# EAGLE board SparkFun_TMC6300_Breakout-Panel (EAGLE 9.6.2), part 1 of 5
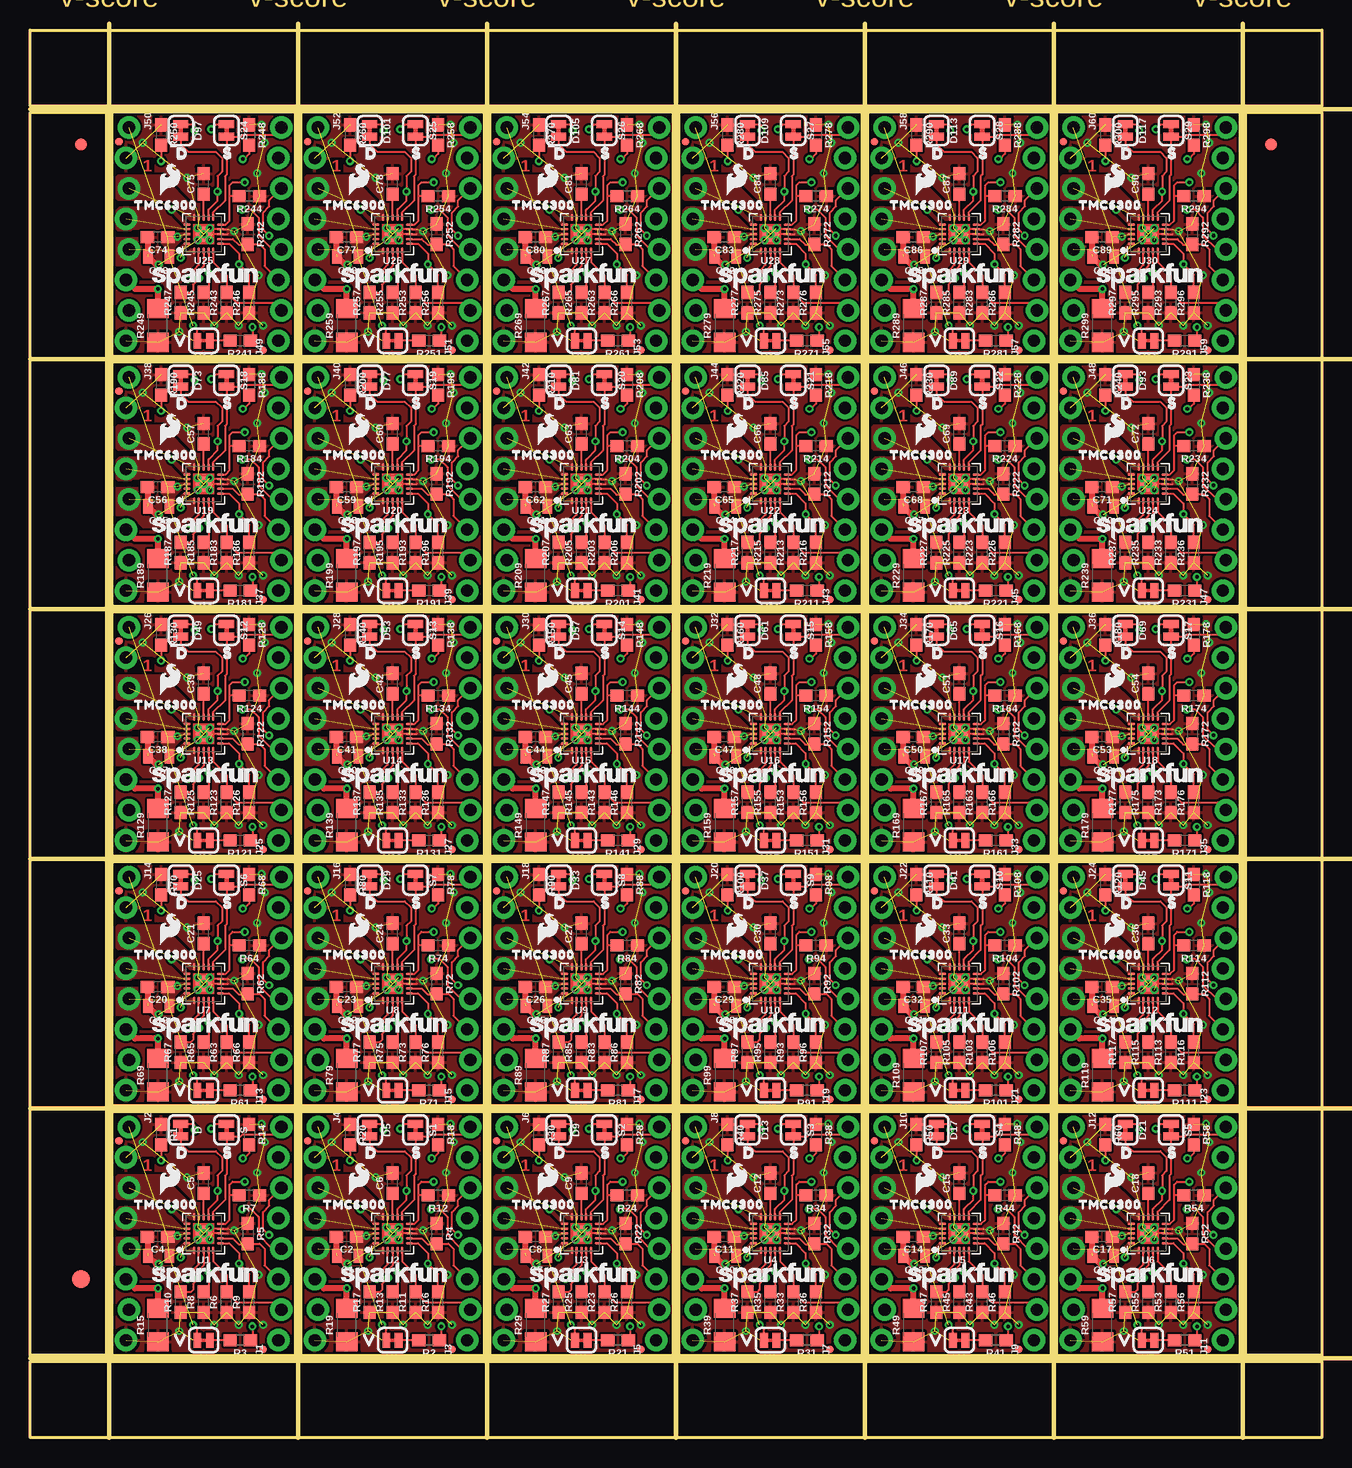
[diagram p0: board, top side]
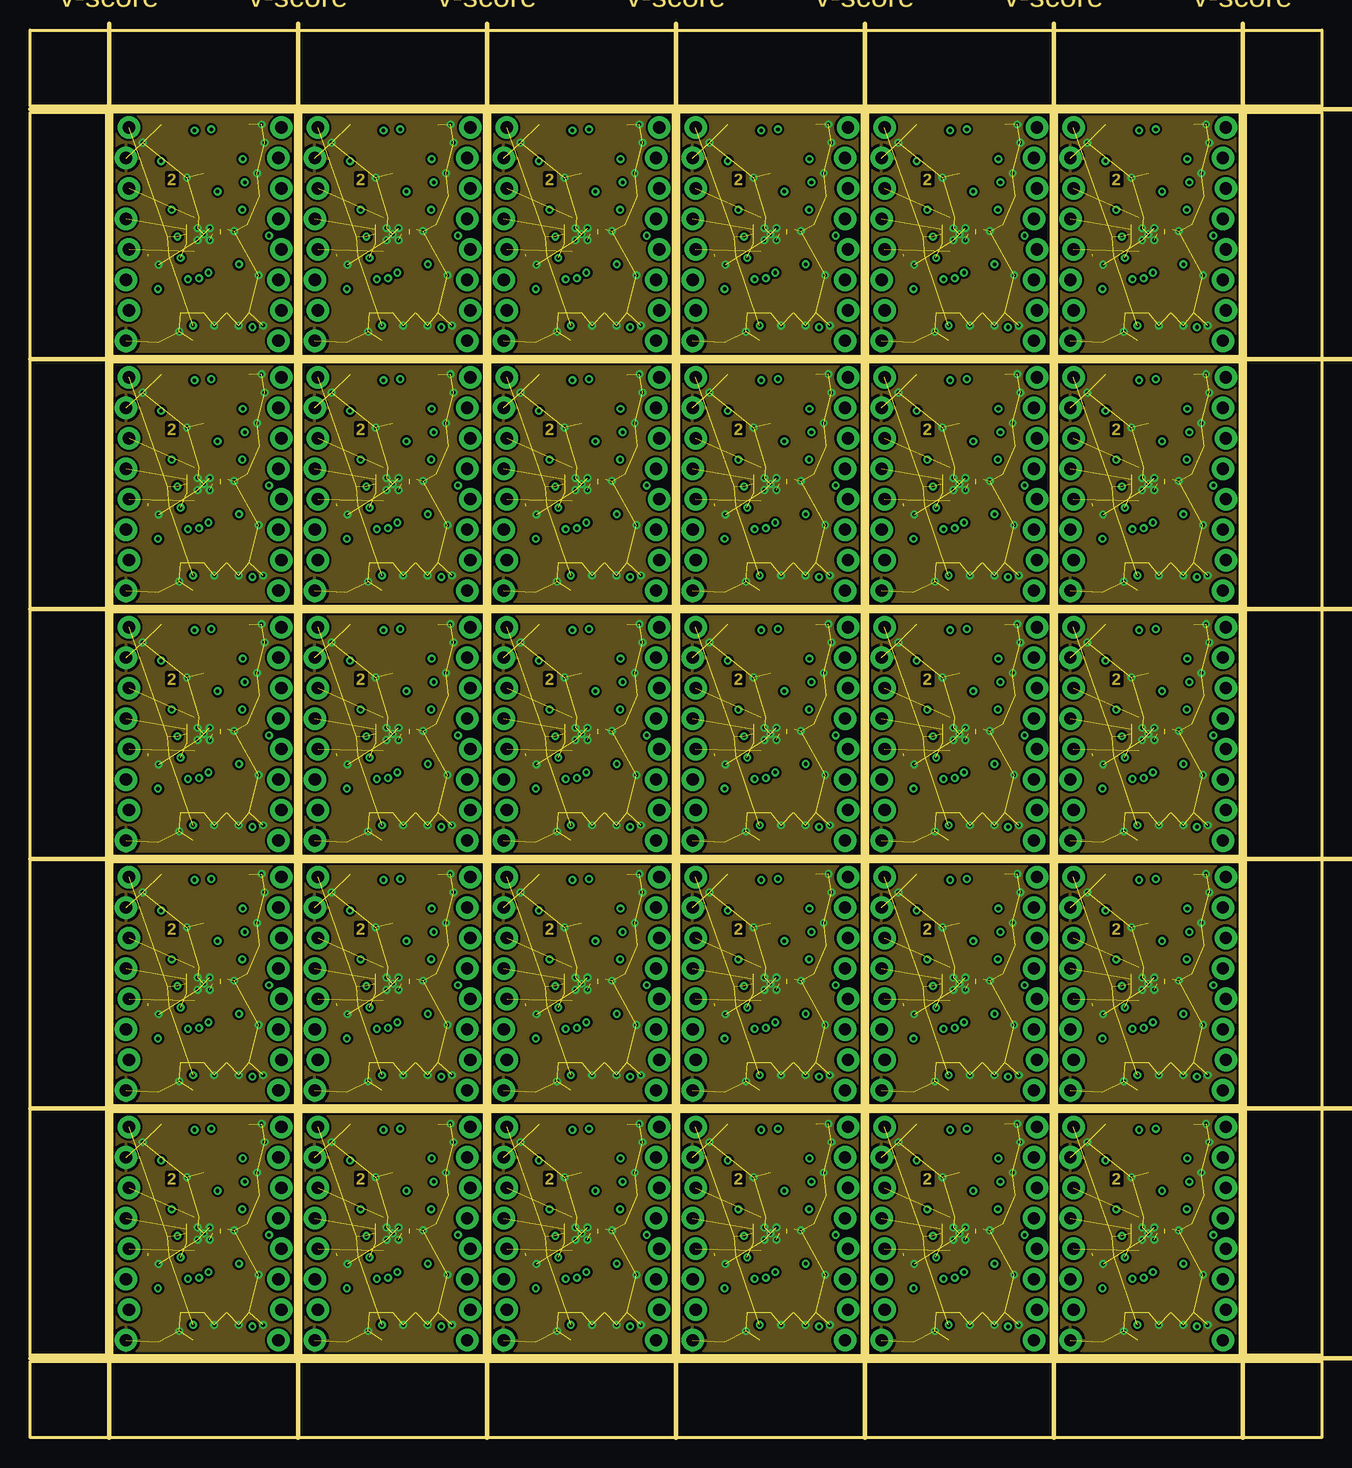
[diagram p1: board, inner layer 2]
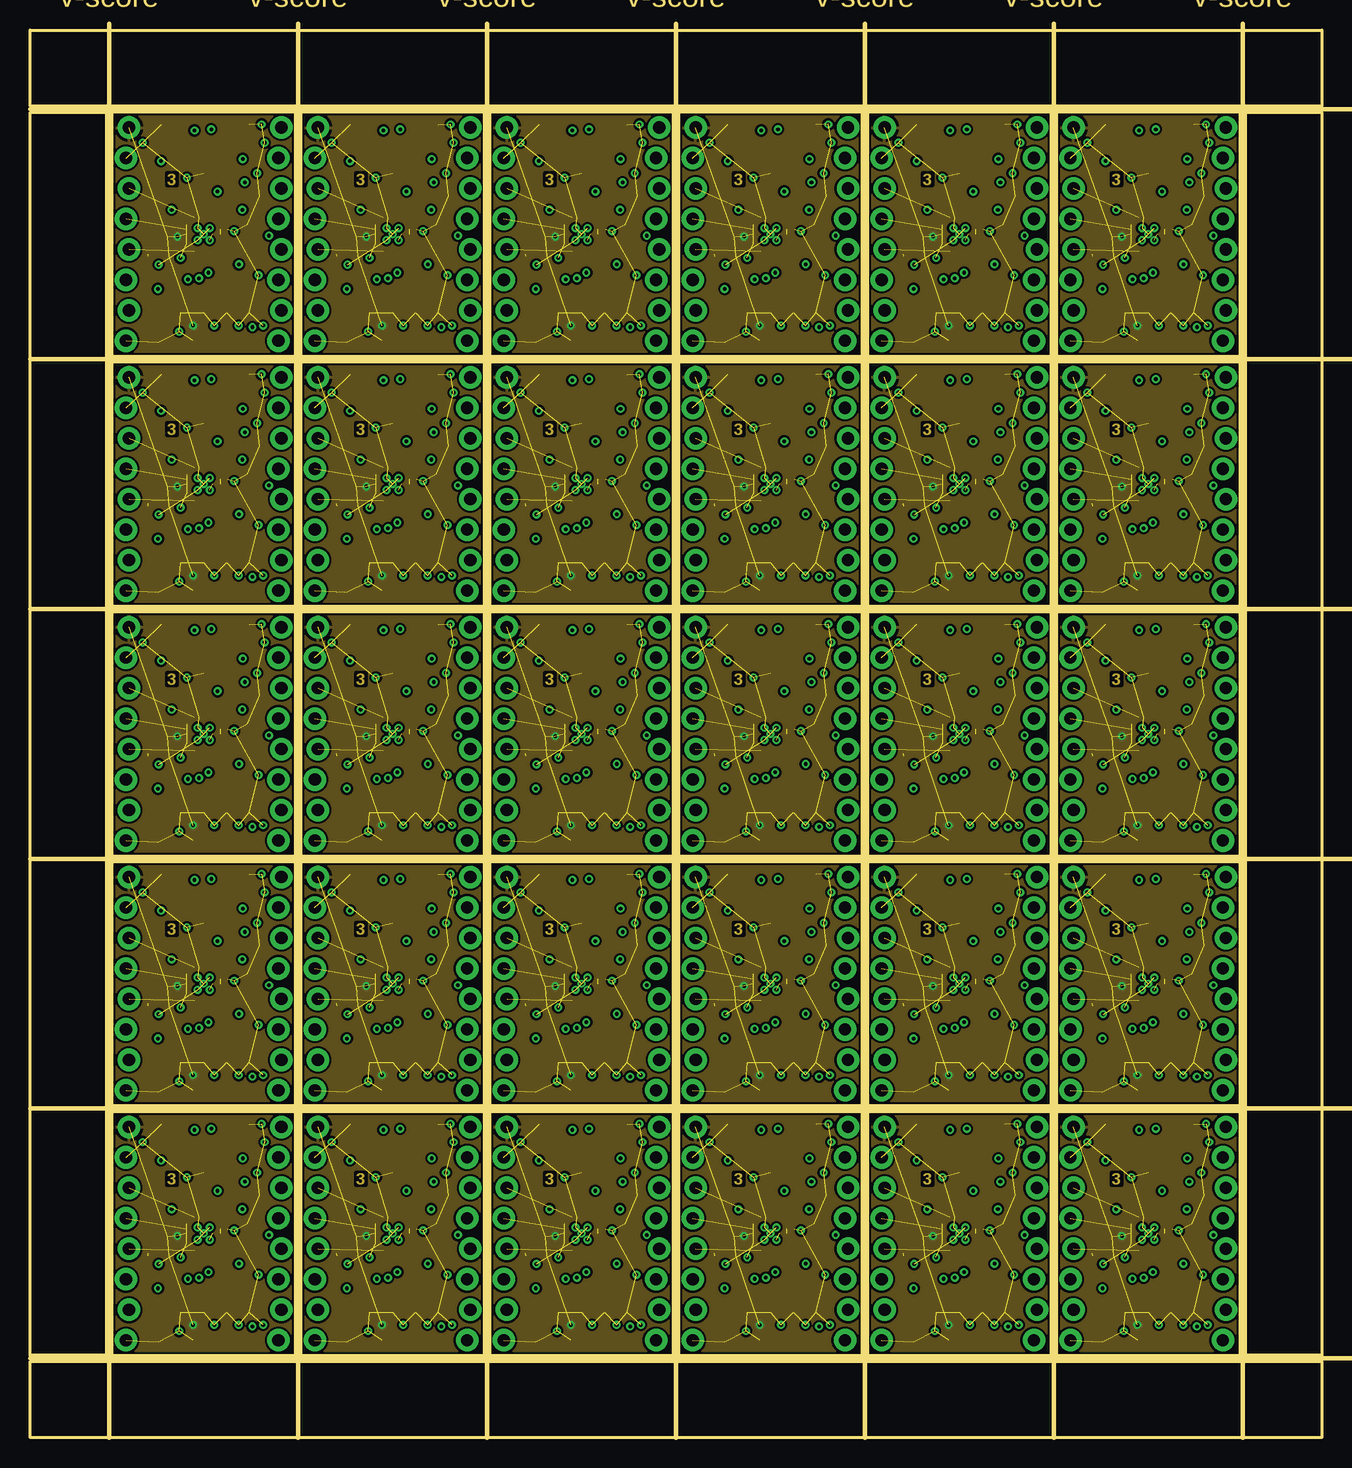
[diagram p2: board, inner layer 15]
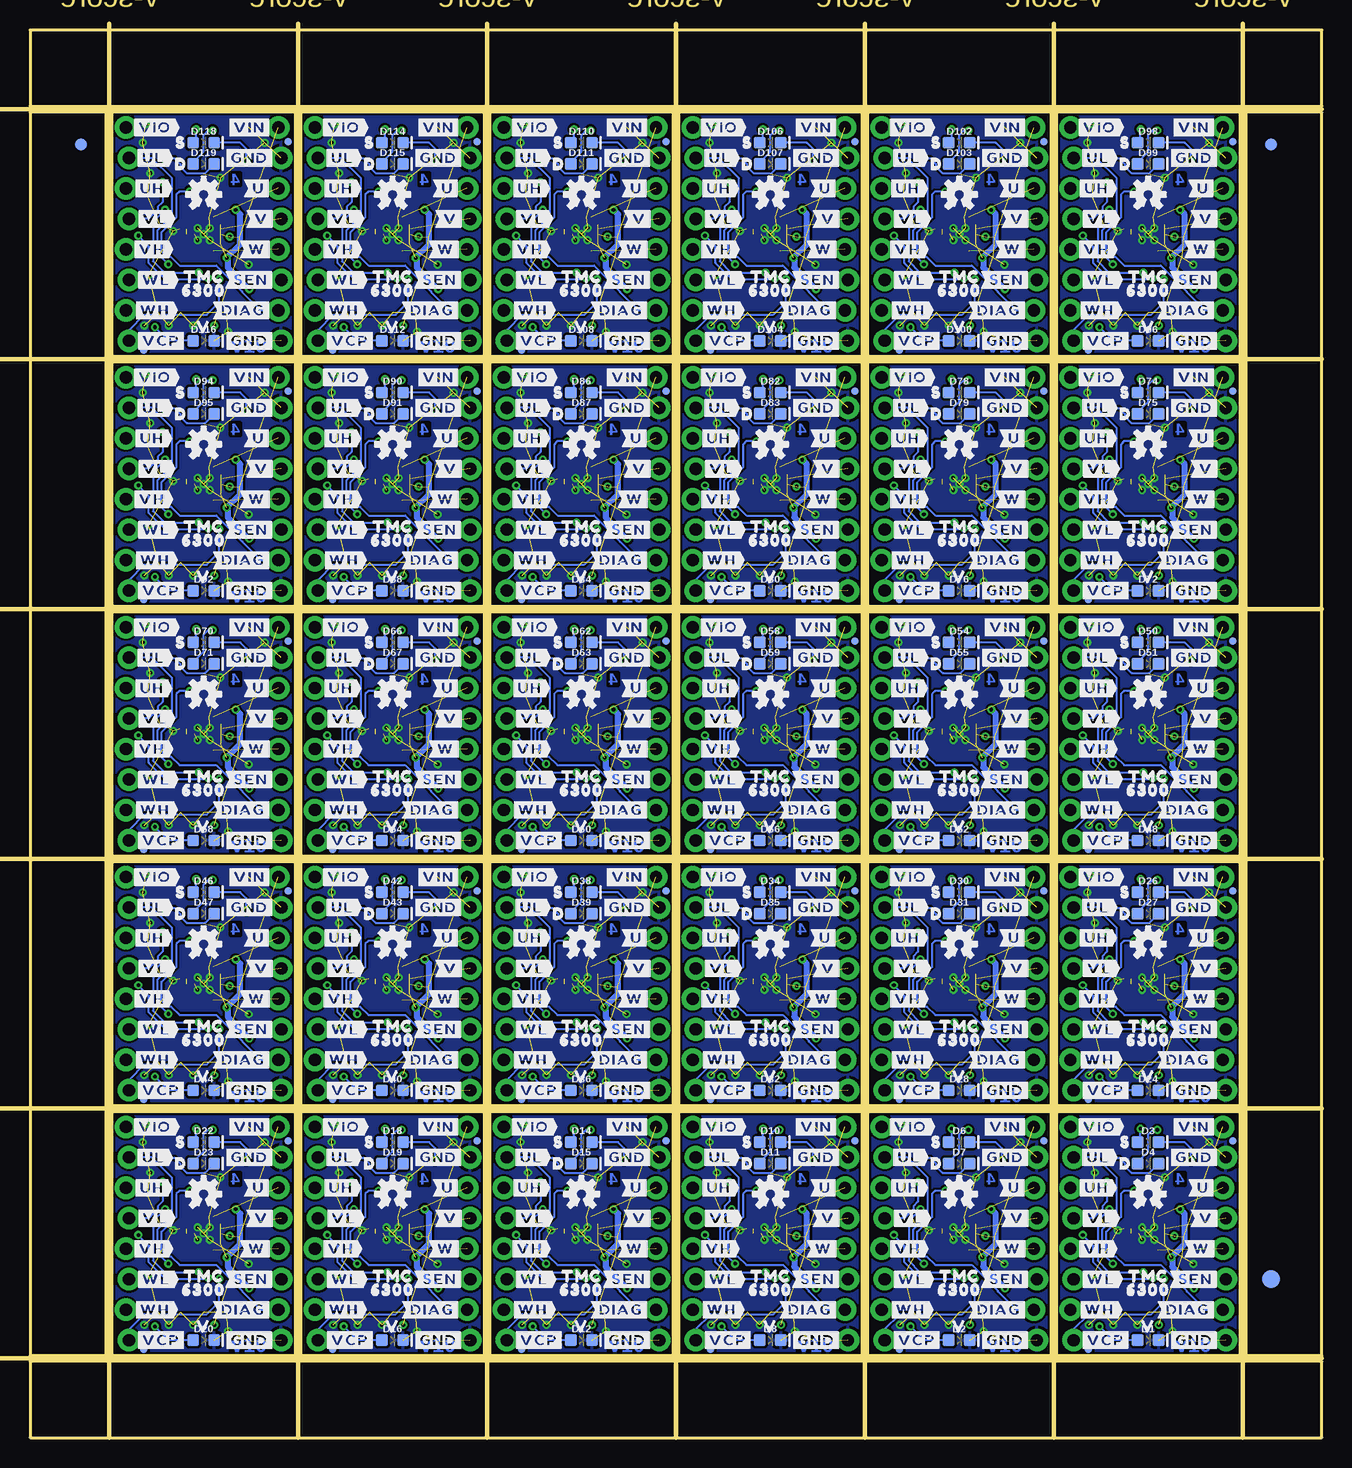
[diagram p3: board, bottom side, seen from below]

Size 107.7 x 117.35 mm. Coordinates in mm from the lower left corner, seen from the top.
Outline: 6.86,6.86 22.1,6.86 22.1,27.18 6.86,27.18 6.86,6.86
Outline: 22.61,6.86 37.85,6.86 37.85,27.18 22.61,27.18 22.61,6.86
Outline: 38.35,6.86 53.59,6.86 53.59,27.18 38.35,27.18 38.35,6.86
Outline: 54.1,6.86 69.34,6.86 69.34,27.18 54.1,27.18 54.1,6.86
Outline: 69.85,6.86 85.09,6.86 85.09,27.18 69.85,27.18 69.85,6.86
Outline: 85.6,6.86 100.84,6.86 100.84,27.18 85.6,27.18 85.6,6.86
Outline: 6.86,27.69 22.1,27.69 22.1,48.01 6.86,48.01 6.86,27.69
Outline: 22.61,27.69 37.85,27.69 37.85,48.01 22.61,48.01 22.61,27.69
Outline: 38.35,27.69 53.59,27.69 53.59,48.01 38.35,48.01 38.35,27.69
Outline: 54.1,27.69 69.34,27.69 69.34,48.01 54.1,48.01 54.1,27.69
Outline: 69.85,27.69 85.09,27.69 85.09,48.01 69.85,48.01 69.85,27.69
Outline: 85.6,27.69 100.84,27.69 100.84,48.01 85.6,48.01 85.6,27.69
Outline: 6.86,48.51 22.1,48.51 22.1,68.83 6.86,68.83 6.86,48.51
Outline: 22.61,48.51 37.85,48.51 37.85,68.83 22.61,68.83 22.61,48.51
Outline: 38.35,48.51 53.59,48.51 53.59,68.83 38.35,68.83 38.35,48.51
Outline: 54.1,48.51 69.34,48.51 69.34,68.83 54.1,68.83 54.1,48.51
Outline: 69.85,48.51 85.09,48.51 85.09,68.83 69.85,68.83 69.85,48.51
Outline: 85.6,48.51 100.84,48.51 100.84,68.83 85.6,68.83 85.6,48.51
Outline: 6.86,69.34 22.1,69.34 22.1,89.66 6.86,89.66 6.86,69.34
Outline: 22.61,69.34 37.85,69.34 37.85,89.66 22.61,89.66 22.61,69.34
Outline: 38.35,69.34 53.59,69.34 53.59,89.66 38.35,89.66 38.35,69.34
Outline: 54.1,69.34 69.34,69.34 69.34,89.66 54.1,89.66 54.1,69.34
Outline: 69.85,69.34 85.09,69.34 85.09,89.66 69.85,89.66 69.85,69.34
Outline: 85.6,69.34 100.84,69.34 100.84,89.66 85.6,89.66 85.6,69.34
Outline: 6.86,90.17 22.1,90.17 22.1,110.49 6.86,110.49 6.86,90.17
Outline: 22.61,90.17 37.85,90.17 37.85,110.49 22.61,110.49 22.61,90.17
Outline: 38.35,90.17 53.59,90.17 53.59,110.49 38.35,110.49 38.35,90.17
Outline: 54.1,90.17 69.34,90.17 69.34,110.49 54.1,110.49 54.1,90.17
Outline: 69.85,90.17 85.09,90.17 85.09,110.49 69.85,110.49 69.85,90.17
Outline: 85.6,90.17 100.84,90.17 100.84,110.49 85.6,110.49 85.6,90.17
Outline: 0,6.35 107.7,6.35 107.7,0 0,0 0,6.35
Outline: 101.35,110.49 107.7,110.49 107.7,6.86 101.35,6.86 101.35,110.49
Outline: 0,117.35 107.7,117.35 107.7,111 0,111 0,117.35
Outline: 0,110.49 6.35,110.49 6.35,6.86 0,6.86 0,110.49
Copper layers (1+2*15+16): Top 0.035559375mm / dielectric 0.47751875mm / layer 2 0.035559375mm / dielectric 0.47751875mm / layer 15 0.035559375mm / dielectric 0.47751875mm / Bottom 0.035559375mm
Design rules "SparkFun_TMC6300_Breakout": minimum track width 7mil, minimum drill 12mil, track to track 7mil, track to pad 7mil, pad to pad 7mil, via to via 7mil, smd to smd 7mil, copper to edge 7mil, drill to drill 7mil, minimum pad ring 7mil, minimum via ring 7mil, stop-mask expansion 3mil, vias tented up to drill 25mil, thermal gap 10mil
tRestrict: area 15.6,17 to 16,17.4; area 31.4,17 to 31.8,17.4; area 47.1,17 to 47.5,17.4; area 62.9,17 to 63.2,17.4; area 78.6,17 to 79,17.4; area 94.4,17 to 94.7,17.4; area 15.6,37.8 to 16,38.2; area 31.4,37.8 to 31.8,38.2; area 47.1,37.8 to 47.5,38.2; area 62.9,37.8 to 63.2,38.2; area 78.6,37.8 to 79,38.2; area 94.4,37.8 to 94.7,38.2; area 15.6,58.7 to 16,59.1; area 31.4,58.7 to 31.8,59.1; area 47.1,58.7 to 47.5,59.1; area 62.9,58.7 to 63.2,59.1; area 78.6,58.7 to 79,59.1; area 94.4,58.7 to 94.7,59.1; area 15.6,79.5 to 16,79.9; area 31.4,79.5 to 31.8,79.9; area 47.1,79.5 to 47.5,79.9; area 62.9,79.5 to 63.2,79.9; area 78.6,79.5 to 79,79.9; area 94.4,79.5 to 94.7,79.9; area 15.6,100.3 to 16,100.7; area 31.4,100.3 to 31.8,100.7; area 47.1,100.3 to 47.5,100.7; area 62.9,100.3 to 63.2,100.7; area 78.6,100.3 to 79,100.7; area 94.4,100.3 to 94.7,100.7
Milling: 13 lines

## Footprints (pad centres in the part's own frame; a part is rotated, then mirrored left to right if it is on the bottom)
0805 = smd 0.8 x 1.2: 1 -0.9,0; 2 0.9,0
0603 = smd 1.1 x 1: 1 -0.85,0; 2 0.85,0
SMT-JUMPER_2_NC_TRACE_SILK = smd 0.66 x 1.27: 1 -0.521,0; 2 0.521,0
LED-0603 = smd 1 x 1: A -0.877,0; C 0.877,0
FIDUCIAL-1X2 = smd 1 x 1: 1 0,0
FIDUCIAL-1.5X3 = smd 1.5 x 1.5: 1 0,0
FIDUCIAL-MICRO = smd 0.635 x 0.635: 1 0,0
1X08_LOCK_NO_SILK = drill 1.016 pad 1.88: 1 0,0.127; 2 2.54,-0.127; 3 5.08,0.127; 4 7.62,-0.127; 5 10.16,0.127; 6 12.7,-0.127; 7 15.24,0.127; 8 17.78,-0.127
1206 = smd 1.6 x 1.8: 1 -1.4,0; 2 1.4,0
QFN-20 = smd 0.6 x 0.2: 1 -1.4,0.8; 2 -1.4,0.4; 3 -1.4,0; 4 -1.4,-0.4; 5 -1.4,-0.8; 11 1.4,-0.8; 12 1.4,-0.4; 13 1.4,0; 14 1.4,0.4; 15 1.4,0.8 | smd 0.2 x 0.6: 6 -0.8,-1.4; 7 -0.4,-1.4; 8 0,-1.4; 9 0.4,-1.4; 10 0.8,-1.4; 16 0.8,1.4; 17 0.4,1.4; 18 0,1.4; 19 -0.4,1.4; 20 -0.8,1.4 | smd 1.27 x 1.27: PAD 0,0

## Placement (x,y rotation side)
C1  10uF  [0805]  26.47,15.16 180 top
C2  0.1uF  [0603]  26.39,16.76 180 top
C3  10uF  [0805]  10.72,15.16 180 top
C4  0.1uF  [0603]  10.64,16.76 180 top
C5  0.1uF  [0603]  14.48,21.21 90 top
C6  0.1uF  [0603]  30.23,21.21 90 top
C7  10uF  [0805]  42.21,15.16 180 top
C8  0.1uF  [0603]  42.14,16.76 180 top
C9  0.1uF  [0603]  45.97,21.21 90 top
C10  10uF  [0805]  57.96,15.16 180 top
C11  0.1uF  [0603]  57.89,16.76 180 top
C12  0.1uF  [0603]  61.72,21.21 90 top
C13  10uF  [0805]  73.71,15.16 180 top
C14  0.1uF  [0603]  73.63,16.76 180 top
C15  0.1uF  [0603]  77.47,21.21 90 top
C16  10uF  [0805]  89.46,15.16 180 top
C17  0.1uF  [0603]  89.38,16.76 180 top
C18  0.1uF  [0603]  93.22,21.21 90 top
C19  10uF  [0805]  10.72,35.99 180 top
C20  0.1uF  [0603]  10.64,37.59 180 top
C21  0.1uF  [0603]  14.48,42.04 90 top
C22  10uF  [0805]  26.47,35.99 180 top
C23  0.1uF  [0603]  26.39,37.59 180 top
C24  0.1uF  [0603]  30.23,42.04 90 top
C25  10uF  [0805]  42.21,35.99 180 top
C26  0.1uF  [0603]  42.14,37.59 180 top
C27  0.1uF  [0603]  45.97,42.04 90 top
C28  10uF  [0805]  57.96,35.99 180 top
C29  0.1uF  [0603]  57.89,37.59 180 top
C30  0.1uF  [0603]  61.72,42.04 90 top
C31  10uF  [0805]  73.71,35.99 180 top
C32  0.1uF  [0603]  73.63,37.59 180 top
C33  0.1uF  [0603]  77.47,42.04 90 top
C34  10uF  [0805]  89.46,35.99 180 top
C35  0.1uF  [0603]  89.38,37.59 180 top
C36  0.1uF  [0603]  93.22,42.04 90 top
C37  10uF  [0805]  10.72,56.82 180 top
C38  0.1uF  [0603]  10.64,58.42 180 top
C39  0.1uF  [0603]  14.48,62.86 90 top
C40  10uF  [0805]  26.47,56.82 180 top
C41  0.1uF  [0603]  26.39,58.42 180 top
C42  0.1uF  [0603]  30.23,62.86 90 top
C43  10uF  [0805]  42.21,56.82 180 top
C44  0.1uF  [0603]  42.14,58.42 180 top
C45  0.1uF  [0603]  45.97,62.86 90 top
C46  10uF  [0805]  57.96,56.82 180 top
C47  0.1uF  [0603]  57.89,58.42 180 top
C48  0.1uF  [0603]  61.72,62.86 90 top
C49  10uF  [0805]  73.71,56.82 180 top
C50  0.1uF  [0603]  73.63,58.42 180 top
C51  0.1uF  [0603]  77.47,62.86 90 top
C52  10uF  [0805]  89.46,56.82 180 top
C53  0.1uF  [0603]  89.38,58.42 180 top
C54  0.1uF  [0603]  93.22,62.86 90 top
C55  10uF  [0805]  10.72,77.65 180 top
C56  0.1uF  [0603]  10.64,79.25 180 top
C57  0.1uF  [0603]  14.48,83.69 90 top
C58  10uF  [0805]  26.47,77.65 180 top
C59  0.1uF  [0603]  26.39,79.25 180 top
C60  0.1uF  [0603]  30.23,83.69 90 top
C61  10uF  [0805]  42.21,77.65 180 top
C62  0.1uF  [0603]  42.14,79.25 180 top
C63  0.1uF  [0603]  45.97,83.69 90 top
C64  10uF  [0805]  57.96,77.65 180 top
C65  0.1uF  [0603]  57.89,79.25 180 top
C66  0.1uF  [0603]  61.72,83.69 90 top
C67  10uF  [0805]  73.71,77.65 180 top
C68  0.1uF  [0603]  73.63,79.25 180 top
C69  0.1uF  [0603]  77.47,83.69 90 top
C70  10uF  [0805]  89.46,77.65 180 top
C71  0.1uF  [0603]  89.38,79.25 180 top
C72  0.1uF  [0603]  93.22,83.69 90 top
C73  10uF  [0805]  10.72,98.48 180 top
C74  0.1uF  [0603]  10.64,100.08 180 top
C75  0.1uF  [0603]  14.48,104.52 90 top
C76  10uF  [0805]  26.47,98.48 180 top
C77  0.1uF  [0603]  26.39,100.08 180 top
C78  0.1uF  [0603]  30.23,104.52 90 top
C79  10uF  [0805]  42.21,98.48 180 top
C80  0.1uF  [0603]  42.14,100.08 180 top
C81  0.1uF  [0603]  45.97,104.52 90 top
C82  10uF  [0805]  57.96,98.48 180 top
C83  0.1uF  [0603]  57.89,100.08 180 top
C84  0.1uF  [0603]  61.72,104.52 90 top
C85  10uF  [0805]  73.71,98.48 180 top
C86  0.1uF  [0603]  73.63,100.08 180 top
C87  0.1uF  [0603]  77.47,104.52 90 top
C88  10uF  [0805]  89.46,98.48 180 top
C89  0.1uF  [0603]  89.38,100.08 180 top
C90  0.1uF  [0603]  93.22,104.52 90 top
D  JUMPER-SMT_2_NC_TRACE_SILK  [SMT-JUMPER_2_NC_TRACE_SILK]  12.57,25.65 270 top
D1  RED  [LED-0603]  14.48,8.13 0 bottom
D2  RED  [LED-0603]  30.23,8.13 0 bottom
D3  BLUE  [LED-0603]  14.48,24.64 0 bottom
D4  GREEN  [LED-0603]  14.48,22.86 0 bottom
D5  JUMPER-SMT_2_NC_TRACE_SILK  [SMT-JUMPER_2_NC_TRACE_SILK]  28.32,25.65 270 top
D6  BLUE  [LED-0603]  30.23,24.64 0 bottom
D7  GREEN  [LED-0603]  30.23,22.86 0 bottom
D8  RED  [LED-0603]  45.97,8.13 0 bottom
D9  JUMPER-SMT_2_NC_TRACE_SILK  [SMT-JUMPER_2_NC_TRACE_SILK]  44.07,25.65 270 top
D10  BLUE  [LED-0603]  45.97,24.64 0 bottom
D11  GREEN  [LED-0603]  45.97,22.86 0 bottom
D12  RED  [LED-0603]  61.72,8.13 0 bottom
D13  JUMPER-SMT_2_NC_TRACE_SILK  [SMT-JUMPER_2_NC_TRACE_SILK]  59.82,25.65 270 top
D14  BLUE  [LED-0603]  61.72,24.64 0 bottom
D15  GREEN  [LED-0603]  61.72,22.86 0 bottom
D16  RED  [LED-0603]  77.47,8.13 0 bottom
D17  JUMPER-SMT_2_NC_TRACE_SILK  [SMT-JUMPER_2_NC_TRACE_SILK]  75.56,25.65 270 top
D18  BLUE  [LED-0603]  77.47,24.64 0 bottom
D19  GREEN  [LED-0603]  77.47,22.86 0 bottom
D20  RED  [LED-0603]  93.22,8.13 0 bottom
D21  JUMPER-SMT_2_NC_TRACE_SILK  [SMT-JUMPER_2_NC_TRACE_SILK]  91.31,25.65 270 top
D22  BLUE  [LED-0603]  93.22,24.64 0 bottom
D23  GREEN  [LED-0603]  93.22,22.86 0 bottom
D24  RED  [LED-0603]  14.48,28.96 0 bottom
D25  JUMPER-SMT_2_NC_TRACE_SILK  [SMT-JUMPER_2_NC_TRACE_SILK]  12.57,46.48 270 top
D26  BLUE  [LED-0603]  14.48,45.47 0 bottom
D27  GREEN  [LED-0603]  14.48,43.69 0 bottom
D28  RED  [LED-0603]  30.23,28.96 0 bottom
D29  JUMPER-SMT_2_NC_TRACE_SILK  [SMT-JUMPER_2_NC_TRACE_SILK]  28.32,46.48 270 top
D30  BLUE  [LED-0603]  30.23,45.47 0 bottom
D31  GREEN  [LED-0603]  30.23,43.69 0 bottom
D32  RED  [LED-0603]  45.97,28.96 0 bottom
D33  JUMPER-SMT_2_NC_TRACE_SILK  [SMT-JUMPER_2_NC_TRACE_SILK]  44.07,46.48 270 top
D34  BLUE  [LED-0603]  45.97,45.47 0 bottom
D35  GREEN  [LED-0603]  45.97,43.69 0 bottom
D36  RED  [LED-0603]  61.72,28.96 0 bottom
D37  JUMPER-SMT_2_NC_TRACE_SILK  [SMT-JUMPER_2_NC_TRACE_SILK]  59.82,46.48 270 top
D38  BLUE  [LED-0603]  61.72,45.47 0 bottom
D39  GREEN  [LED-0603]  61.72,43.69 0 bottom
D40  RED  [LED-0603]  77.47,28.96 0 bottom
D41  JUMPER-SMT_2_NC_TRACE_SILK  [SMT-JUMPER_2_NC_TRACE_SILK]  75.56,46.48 270 top
D42  BLUE  [LED-0603]  77.47,45.47 0 bottom
D43  GREEN  [LED-0603]  77.47,43.69 0 bottom
D44  RED  [LED-0603]  93.22,28.96 0 bottom
D45  JUMPER-SMT_2_NC_TRACE_SILK  [SMT-JUMPER_2_NC_TRACE_SILK]  91.31,46.48 270 top
D46  BLUE  [LED-0603]  93.22,45.47 0 bottom
D47  GREEN  [LED-0603]  93.22,43.69 0 bottom
D48  RED  [LED-0603]  14.48,49.78 0 bottom
D49  JUMPER-SMT_2_NC_TRACE_SILK  [SMT-JUMPER_2_NC_TRACE_SILK]  12.57,67.31 270 top
D50  BLUE  [LED-0603]  14.48,66.29 0 bottom
D51  GREEN  [LED-0603]  14.48,64.52 0 bottom
D52  RED  [LED-0603]  30.23,49.78 0 bottom
D53  JUMPER-SMT_2_NC_TRACE_SILK  [SMT-JUMPER_2_NC_TRACE_SILK]  28.32,67.31 270 top
D54  BLUE  [LED-0603]  30.23,66.29 0 bottom
D55  GREEN  [LED-0603]  30.23,64.52 0 bottom
D56  RED  [LED-0603]  45.97,49.78 0 bottom
D57  JUMPER-SMT_2_NC_TRACE_SILK  [SMT-JUMPER_2_NC_TRACE_SILK]  44.07,67.31 270 top
D58  BLUE  [LED-0603]  45.97,66.29 0 bottom
D59  GREEN  [LED-0603]  45.97,64.52 0 bottom
D60  RED  [LED-0603]  61.72,49.78 0 bottom
D61  JUMPER-SMT_2_NC_TRACE_SILK  [SMT-JUMPER_2_NC_TRACE_SILK]  59.82,67.31 270 top
D62  BLUE  [LED-0603]  61.72,66.29 0 bottom
D63  GREEN  [LED-0603]  61.72,64.52 0 bottom
D64  RED  [LED-0603]  77.47,49.78 0 bottom
D65  JUMPER-SMT_2_NC_TRACE_SILK  [SMT-JUMPER_2_NC_TRACE_SILK]  75.56,67.31 270 top
D66  BLUE  [LED-0603]  77.47,66.29 0 bottom
D67  GREEN  [LED-0603]  77.47,64.52 0 bottom
D68  RED  [LED-0603]  93.22,49.78 0 bottom
D69  JUMPER-SMT_2_NC_TRACE_SILK  [SMT-JUMPER_2_NC_TRACE_SILK]  91.31,67.31 270 top
D70  BLUE  [LED-0603]  93.22,66.29 0 bottom
D71  GREEN  [LED-0603]  93.22,64.52 0 bottom
D72  RED  [LED-0603]  14.48,70.61 0 bottom
D73  JUMPER-SMT_2_NC_TRACE_SILK  [SMT-JUMPER_2_NC_TRACE_SILK]  12.57,88.14 270 top
D74  BLUE  [LED-0603]  14.48,87.12 0 bottom
D75  GREEN  [LED-0603]  14.48,85.34 0 bottom
D76  RED  [LED-0603]  30.23,70.61 0 bottom
D77  JUMPER-SMT_2_NC_TRACE_SILK  [SMT-JUMPER_2_NC_TRACE_SILK]  28.32,88.14 270 top
D78  BLUE  [LED-0603]  30.23,87.12 0 bottom
D79  GREEN  [LED-0603]  30.23,85.34 0 bottom
D80  RED  [LED-0603]  45.97,70.61 0 bottom
D81  JUMPER-SMT_2_NC_TRACE_SILK  [SMT-JUMPER_2_NC_TRACE_SILK]  44.07,88.14 270 top
D82  BLUE  [LED-0603]  45.97,87.12 0 bottom
D83  GREEN  [LED-0603]  45.97,85.34 0 bottom
D84  RED  [LED-0603]  61.72,70.61 0 bottom
D85  JUMPER-SMT_2_NC_TRACE_SILK  [SMT-JUMPER_2_NC_TRACE_SILK]  59.82,88.14 270 top
D86  BLUE  [LED-0603]  61.72,87.12 0 bottom
D87  GREEN  [LED-0603]  61.72,85.34 0 bottom
D88  RED  [LED-0603]  77.47,70.61 0 bottom
D89  JUMPER-SMT_2_NC_TRACE_SILK  [SMT-JUMPER_2_NC_TRACE_SILK]  75.56,88.14 270 top
D90  BLUE  [LED-0603]  77.47,87.12 0 bottom
D91  GREEN  [LED-0603]  77.47,85.34 0 bottom
D92  RED  [LED-0603]  93.22,70.61 0 bottom
D93  JUMPER-SMT_2_NC_TRACE_SILK  [SMT-JUMPER_2_NC_TRACE_SILK]  91.31,88.14 270 top
D94  BLUE  [LED-0603]  93.22,87.12 0 bottom
D95  GREEN  [LED-0603]  93.22,85.34 0 bottom
D96  RED  [LED-0603]  14.48,91.44 0 bottom
D97  JUMPER-SMT_2_NC_TRACE_SILK  [SMT-JUMPER_2_NC_TRACE_SILK]  12.57,108.97 270 top
D98  BLUE  [LED-0603]  14.48,107.95 0 bottom
D99  GREEN  [LED-0603]  14.48,106.17 0 bottom
D100  RED  [LED-0603]  30.23,91.44 0 bottom
D101  JUMPER-SMT_2_NC_TRACE_SILK  [SMT-JUMPER_2_NC_TRACE_SILK]  28.32,108.97 270 top
D102  BLUE  [LED-0603]  30.23,107.95 0 bottom
D103  GREEN  [LED-0603]  30.23,106.17 0 bottom
D104  RED  [LED-0603]  45.97,91.44 0 bottom
D105  JUMPER-SMT_2_NC_TRACE_SILK  [SMT-JUMPER_2_NC_TRACE_SILK]  44.07,108.97 270 top
D106  BLUE  [LED-0603]  45.97,107.95 0 bottom
D107  GREEN  [LED-0603]  45.97,106.17 0 bottom
D108  RED  [LED-0603]  61.72,91.44 0 bottom
D109  JUMPER-SMT_2_NC_TRACE_SILK  [SMT-JUMPER_2_NC_TRACE_SILK]  59.82,108.97 270 top
D110  BLUE  [LED-0603]  61.72,107.95 0 bottom
D111  GREEN  [LED-0603]  61.72,106.17 0 bottom
D112  RED  [LED-0603]  77.47,91.44 0 bottom
D113  JUMPER-SMT_2_NC_TRACE_SILK  [SMT-JUMPER_2_NC_TRACE_SILK]  75.56,108.97 270 top
D114  BLUE  [LED-0603]  77.47,107.95 0 bottom
D115  GREEN  [LED-0603]  77.47,106.17 0 bottom
D116  RED  [LED-0603]  93.22,91.44 0 bottom
D117  JUMPER-SMT_2_NC_TRACE_SILK  [SMT-JUMPER_2_NC_TRACE_SILK]  91.31,108.97 270 top
D118  BLUE  [LED-0603]  93.22,107.95 0 bottom
D119  GREEN  [LED-0603]  93.22,106.17 0 bottom
E$1  [FIDUCIAL-1X2]  4.23,107.82 0 top
E$2  [FIDUCIAL-1X2]  4.23,107.82 0 bottom
E$3  [FIDUCIAL-1X2]  103.46,107.82 0 top
E$4  [FIDUCIAL-1X2]  103.46,107.82 0 bottom
E$5  [FIDUCIAL-1.5X3]  4.23,13.21 0 top
E$6  [FIDUCIAL-1.5X3]  4.23,13.21 0 bottom
FD1  FIDUCIALUFIDUCIAL  [FIDUCIAL-MICRO]  7.42,24.74 180 top
FD2  FIDUCIALUFIDUCIAL  [FIDUCIAL-MICRO]  19.46,7.37 180 top
FD3  FIDUCIALUFIDUCIAL  [FIDUCIAL-MICRO]  19.46,7.37 180 bottom
FD4  FIDUCIALUFIDUCIAL  [FIDUCIAL-MICRO]  7.42,24.74 180 bottom
FD5  FIDUCIALUFIDUCIAL  [FIDUCIAL-MICRO]  23.16,24.74 180 top
FD6  FIDUCIALUFIDUCIAL  [FIDUCIAL-MICRO]  35.2,7.37 180 top
FD7  FIDUCIALUFIDUCIAL  [FIDUCIAL-MICRO]  35.2,7.37 180 bottom
FD8  FIDUCIALUFIDUCIAL  [FIDUCIAL-MICRO]  23.16,24.74 180 bottom
FD9  FIDUCIALUFIDUCIAL  [FIDUCIAL-MICRO]  38.91,24.74 180 top
FD10  FIDUCIALUFIDUCIAL  [FIDUCIAL-MICRO]  50.95,7.37 180 top
FD11  FIDUCIALUFIDUCIAL  [FIDUCIAL-MICRO]  50.95,7.37 180 bottom
FD12  FIDUCIALUFIDUCIAL  [FIDUCIAL-MICRO]  38.91,24.74 180 bottom
FD13  FIDUCIALUFIDUCIAL  [FIDUCIAL-MICRO]  54.66,24.74 180 top
FD14  FIDUCIALUFIDUCIAL  [FIDUCIAL-MICRO]  66.7,7.37 180 top
FD15  FIDUCIALUFIDUCIAL  [FIDUCIAL-MICRO]  66.7,7.37 180 bottom
FD16  FIDUCIALUFIDUCIAL  [FIDUCIAL-MICRO]  54.66,24.74 180 bottom
FD17  FIDUCIALUFIDUCIAL  [FIDUCIAL-MICRO]  70.41,24.74 180 top
FD18  FIDUCIALUFIDUCIAL  [FIDUCIAL-MICRO]  82.45,7.37 180 top
FD19  FIDUCIALUFIDUCIAL  [FIDUCIAL-MICRO]  82.45,7.37 180 bottom
FD20  FIDUCIALUFIDUCIAL  [FIDUCIAL-MICRO]  70.41,24.74 180 bottom
FD21  FIDUCIALUFIDUCIAL  [FIDUCIAL-MICRO]  86.16,24.74 180 top
FD22  FIDUCIALUFIDUCIAL  [FIDUCIAL-MICRO]  98.2,7.37 180 top
FD23  FIDUCIALUFIDUCIAL  [FIDUCIAL-MICRO]  98.2,7.37 180 bottom
FD24  FIDUCIALUFIDUCIAL  [FIDUCIAL-MICRO]  86.16,24.74 180 bottom
FD25  FIDUCIALUFIDUCIAL  [FIDUCIAL-MICRO]  7.42,45.57 180 top
FD26  FIDUCIALUFIDUCIAL  [FIDUCIAL-MICRO]  19.46,28.19 180 top
FD27  FIDUCIALUFIDUCIAL  [FIDUCIAL-MICRO]  19.46,28.19 180 bottom
FD28  FIDUCIALUFIDUCIAL  [FIDUCIAL-MICRO]  7.42,45.57 180 bottom
FD29  FIDUCIALUFIDUCIAL  [FIDUCIAL-MICRO]  23.16,45.57 180 top
FD30  FIDUCIALUFIDUCIAL  [FIDUCIAL-MICRO]  35.2,28.19 180 top
FD31  FIDUCIALUFIDUCIAL  [FIDUCIAL-MICRO]  35.2,28.19 180 bottom
FD32  FIDUCIALUFIDUCIAL  [FIDUCIAL-MICRO]  23.16,45.57 180 bottom
FD33  FIDUCIALUFIDUCIAL  [FIDUCIAL-MICRO]  38.91,45.57 180 top
FD34  FIDUCIALUFIDUCIAL  [FIDUCIAL-MICRO]  50.95,28.19 180 top
FD35  FIDUCIALUFIDUCIAL  [FIDUCIAL-MICRO]  50.95,28.19 180 bottom
FD36  FIDUCIALUFIDUCIAL  [FIDUCIAL-MICRO]  38.91,45.57 180 bottom
FD37  FIDUCIALUFIDUCIAL  [FIDUCIAL-MICRO]  54.66,45.57 180 top
FD38  FIDUCIALUFIDUCIAL  [FIDUCIAL-MICRO]  66.7,28.19 180 top
FD39  FIDUCIALUFIDUCIAL  [FIDUCIAL-MICRO]  66.7,28.19 180 bottom
FD40  FIDUCIALUFIDUCIAL  [FIDUCIAL-MICRO]  54.66,45.57 180 bottom
FD41  FIDUCIALUFIDUCIAL  [FIDUCIAL-MICRO]  70.41,45.57 180 top
FD42  FIDUCIALUFIDUCIAL  [FIDUCIAL-MICRO]  82.45,28.19 180 top
FD43  FIDUCIALUFIDUCIAL  [FIDUCIAL-MICRO]  82.45,28.19 180 bottom
FD44  FIDUCIALUFIDUCIAL  [FIDUCIAL-MICRO]  70.41,45.57 180 bottom
FD45  FIDUCIALUFIDUCIAL  [FIDUCIAL-MICRO]  86.16,45.57 180 top
FD46  FIDUCIALUFIDUCIAL  [FIDUCIAL-MICRO]  98.2,28.19 180 top
FD47  FIDUCIALUFIDUCIAL  [FIDUCIAL-MICRO]  98.2,28.19 180 bottom
FD48  FIDUCIALUFIDUCIAL  [FIDUCIAL-MICRO]  86.16,45.57 180 bottom
FD49  FIDUCIALUFIDUCIAL  [FIDUCIAL-MICRO]  7.42,66.4 180 top
FD50  FIDUCIALUFIDUCIAL  [FIDUCIAL-MICRO]  19.46,49.02 180 top
FD51  FIDUCIALUFIDUCIAL  [FIDUCIAL-MICRO]  19.46,49.02 180 bottom
FD52  FIDUCIALUFIDUCIAL  [FIDUCIAL-MICRO]  7.42,66.4 180 bottom
FD53  FIDUCIALUFIDUCIAL  [FIDUCIAL-MICRO]  23.16,66.4 180 top
FD54  FIDUCIALUFIDUCIAL  [FIDUCIAL-MICRO]  35.2,49.02 180 top
FD55  FIDUCIALUFIDUCIAL  [FIDUCIAL-MICRO]  35.2,49.02 180 bottom
FD56  FIDUCIALUFIDUCIAL  [FIDUCIAL-MICRO]  23.16,66.4 180 bottom
FD57  FIDUCIALUFIDUCIAL  [FIDUCIAL-MICRO]  38.91,66.4 180 top
FD58  FIDUCIALUFIDUCIAL  [FIDUCIAL-MICRO]  50.95,49.02 180 top
FD59  FIDUCIALUFIDUCIAL  [FIDUCIAL-MICRO]  50.95,49.02 180 bottom
FD60  FIDUCIALUFIDUCIAL  [FIDUCIAL-MICRO]  38.91,66.4 180 bottom
FD61  FIDUCIALUFIDUCIAL  [FIDUCIAL-MICRO]  54.66,66.4 180 top
FD62  FIDUCIALUFIDUCIAL  [FIDUCIAL-MICRO]  66.7,49.02 180 top
FD63  FIDUCIALUFIDUCIAL  [FIDUCIAL-MICRO]  66.7,49.02 180 bottom
FD64  FIDUCIALUFIDUCIAL  [FIDUCIAL-MICRO]  54.66,66.4 180 bottom
FD65  FIDUCIALUFIDUCIAL  [FIDUCIAL-MICRO]  70.41,66.4 180 top
FD66  FIDUCIALUFIDUCIAL  [FIDUCIAL-MICRO]  82.45,49.02 180 top
FD67  FIDUCIALUFIDUCIAL  [FIDUCIAL-MICRO]  82.45,49.02 180 bottom
FD68  FIDUCIALUFIDUCIAL  [FIDUCIAL-MICRO]  70.41,66.4 180 bottom
FD69  FIDUCIALUFIDUCIAL  [FIDUCIAL-MICRO]  86.16,66.4 180 top
FD70  FIDUCIALUFIDUCIAL  [FIDUCIAL-MICRO]  98.2,49.02 180 top
FD71  FIDUCIALUFIDUCIAL  [FIDUCIAL-MICRO]  98.2,49.02 180 bottom
FD72  FIDUCIALUFIDUCIAL  [FIDUCIAL-MICRO]  86.16,66.4 180 bottom
FD73  FIDUCIALUFIDUCIAL  [FIDUCIAL-MICRO]  7.42,87.22 180 top
FD74  FIDUCIALUFIDUCIAL  [FIDUCIAL-MICRO]  19.46,69.85 180 top
FD75  FIDUCIALUFIDUCIAL  [FIDUCIAL-MICRO]  19.46,69.85 180 bottom
FD76  FIDUCIALUFIDUCIAL  [FIDUCIAL-MICRO]  7.42,87.22 180 bottom
FD77  FIDUCIALUFIDUCIAL  [FIDUCIAL-MICRO]  23.16,87.22 180 top
FD78  FIDUCIALUFIDUCIAL  [FIDUCIAL-MICRO]  35.2,69.85 180 top
FD79  FIDUCIALUFIDUCIAL  [FIDUCIAL-MICRO]  35.2,69.85 180 bottom
FD80  FIDUCIALUFIDUCIAL  [FIDUCIAL-MICRO]  23.16,87.22 180 bottom
FD81  FIDUCIALUFIDUCIAL  [FIDUCIAL-MICRO]  38.91,87.22 180 top
FD82  FIDUCIALUFIDUCIAL  [FIDUCIAL-MICRO]  50.95,69.85 180 top
FD83  FIDUCIALUFIDUCIAL  [FIDUCIAL-MICRO]  50.95,69.85 180 bottom
FD84  FIDUCIALUFIDUCIAL  [FIDUCIAL-MICRO]  38.91,87.22 180 bottom
FD85  FIDUCIALUFIDUCIAL  [FIDUCIAL-MICRO]  54.66,87.22 180 top
FD86  FIDUCIALUFIDUCIAL  [FIDUCIAL-MICRO]  66.7,69.85 180 top
FD87  FIDUCIALUFIDUCIAL  [FIDUCIAL-MICRO]  66.7,69.85 180 bottom
FD88  FIDUCIALUFIDUCIAL  [FIDUCIAL-MICRO]  54.66,87.22 180 bottom
FD89  FIDUCIALUFIDUCIAL  [FIDUCIAL-MICRO]  70.41,87.22 180 top
FD90  FIDUCIALUFIDUCIAL  [FIDUCIAL-MICRO]  82.45,69.85 180 top
FD91  FIDUCIALUFIDUCIAL  [FIDUCIAL-MICRO]  82.45,69.85 180 bottom
FD92  FIDUCIALUFIDUCIAL  [FIDUCIAL-MICRO]  70.41,87.22 180 bottom
FD93  FIDUCIALUFIDUCIAL  [FIDUCIAL-MICRO]  86.16,87.22 180 top
FD94  FIDUCIALUFIDUCIAL  [FIDUCIAL-MICRO]  98.2,69.85 180 top
FD95  FIDUCIALUFIDUCIAL  [FIDUCIAL-MICRO]  98.2,69.85 180 bottom
FD96  FIDUCIALUFIDUCIAL  [FIDUCIAL-MICRO]  86.16,87.22 180 bottom
FD97  FIDUCIALUFIDUCIAL  [FIDUCIAL-MICRO]  7.42,108.05 180 top
FD98  FIDUCIALUFIDUCIAL  [FIDUCIAL-MICRO]  19.46,90.68 180 top
FD99  FIDUCIALUFIDUCIAL  [FIDUCIAL-MICRO]  19.46,90.68 180 bottom
FD100  FIDUCIALUFIDUCIAL  [FIDUCIAL-MICRO]  7.42,108.05 180 bottom
FD101  FIDUCIALUFIDUCIAL  [FIDUCIAL-MICRO]  23.16,108.05 180 top
FD102  FIDUCIALUFIDUCIAL  [FIDUCIAL-MICRO]  35.2,90.68 180 top
FD103  FIDUCIALUFIDUCIAL  [FIDUCIAL-MICRO]  35.2,90.68 180 bottom
FD104  FIDUCIALUFIDUCIAL  [FIDUCIAL-MICRO]  23.16,108.05 180 bottom
FD105  FIDUCIALUFIDUCIAL  [FIDUCIAL-MICRO]  38.91,108.05 180 top
FD106  FIDUCIALUFIDUCIAL  [FIDUCIAL-MICRO]  50.95,90.68 180 top
FD107  FIDUCIALUFIDUCIAL  [FIDUCIAL-MICRO]  50.95,90.68 180 bottom
FD108  FIDUCIALUFIDUCIAL  [FIDUCIAL-MICRO]  38.91,108.05 180 bottom
FD109  FIDUCIALUFIDUCIAL  [FIDUCIAL-MICRO]  54.66,108.05 180 top
FD110  FIDUCIALUFIDUCIAL  [FIDUCIAL-MICRO]  66.7,90.68 180 top
FD111  FIDUCIALUFIDUCIAL  [FIDUCIAL-MICRO]  66.7,90.68 180 bottom
FD112  FIDUCIALUFIDUCIAL  [FIDUCIAL-MICRO]  54.66,108.05 180 bottom
FD113  FIDUCIALUFIDUCIAL  [FIDUCIAL-MICRO]  70.41,108.05 180 top
FD114  FIDUCIALUFIDUCIAL  [FIDUCIAL-MICRO]  82.45,90.68 180 top
FD115  FIDUCIALUFIDUCIAL  [FIDUCIAL-MICRO]  82.45,90.68 180 bottom
FD116  FIDUCIALUFIDUCIAL  [FIDUCIAL-MICRO]  70.41,108.05 180 bottom
FD117  FIDUCIALUFIDUCIAL  [FIDUCIAL-MICRO]  86.16,108.05 180 top
FD118  FIDUCIALUFIDUCIAL  [FIDUCIAL-MICRO]  98.2,90.68 180 top
FD119  FIDUCIALUFIDUCIAL  [FIDUCIAL-MICRO]  98.2,90.68 180 bottom
FD120  FIDUCIALUFIDUCIAL  [FIDUCIAL-MICRO]  86.16,108.05 180 bottom
J1  [1X08_LOCK_NO_SILK]  20.83,8.13 90 top
J2  [1X08_LOCK_NO_SILK]  8.13,25.91 270 top
J3  [1X08_LOCK_NO_SILK]  36.58,8.13 90 top
J4  [1X08_LOCK_NO_SILK]  23.88,25.91 270 top
J5  [1X08_LOCK_NO_SILK]  52.32,8.13 90 top
J6  [1X08_LOCK_NO_SILK]  39.62,25.91 270 top
J7  [1X08_LOCK_NO_SILK]  68.07,8.13 90 top
J8  [1X08_LOCK_NO_SILK]  55.37,25.91 270 top
J9  [1X08_LOCK_NO_SILK]  83.82,8.13 90 top
J10  [1X08_LOCK_NO_SILK]  71.12,25.91 270 top
J11  [1X08_LOCK_NO_SILK]  99.57,8.13 90 top
J12  [1X08_LOCK_NO_SILK]  86.87,25.91 270 top
J13  [1X08_LOCK_NO_SILK]  20.83,28.96 90 top
J14  [1X08_LOCK_NO_SILK]  8.13,46.74 270 top
J15  [1X08_LOCK_NO_SILK]  36.58,28.96 90 top
J16  [1X08_LOCK_NO_SILK]  23.88,46.74 270 top
J17  [1X08_LOCK_NO_SILK]  52.32,28.96 90 top
J18  [1X08_LOCK_NO_SILK]  39.62,46.74 270 top
J19  [1X08_LOCK_NO_SILK]  68.07,28.96 90 top
J20  [1X08_LOCK_NO_SILK]  55.37,46.74 270 top
J21  [1X08_LOCK_NO_SILK]  83.82,28.96 90 top
J22  [1X08_LOCK_NO_SILK]  71.12,46.74 270 top
J23  [1X08_LOCK_NO_SILK]  99.57,28.96 90 top
J24  [1X08_LOCK_NO_SILK]  86.87,46.74 270 top
J25  [1X08_LOCK_NO_SILK]  20.83,49.78 90 top
J26  [1X08_LOCK_NO_SILK]  8.13,67.56 270 top
J27  [1X08_LOCK_NO_SILK]  36.58,49.78 90 top
J28  [1X08_LOCK_NO_SILK]  23.88,67.56 270 top
J29  [1X08_LOCK_NO_SILK]  52.32,49.78 90 top
J30  [1X08_LOCK_NO_SILK]  39.62,67.56 270 top
J31  [1X08_LOCK_NO_SILK]  68.07,49.78 90 top
J32  [1X08_LOCK_NO_SILK]  55.37,67.56 270 top
J33  [1X08_LOCK_NO_SILK]  83.82,49.78 90 top
J34  [1X08_LOCK_NO_SILK]  71.12,67.56 270 top
J35  [1X08_LOCK_NO_SILK]  99.57,49.78 90 top
J36  [1X08_LOCK_NO_SILK]  86.87,67.56 270 top
J37  [1X08_LOCK_NO_SILK]  20.83,70.61 90 top
J38  [1X08_LOCK_NO_SILK]  8.13,88.39 270 top
J39  [1X08_LOCK_NO_SILK]  36.58,70.61 90 top
J40  [1X08_LOCK_NO_SILK]  23.88,88.39 270 top
J41  [1X08_LOCK_NO_SILK]  52.32,70.61 90 top
J42  [1X08_LOCK_NO_SILK]  39.62,88.39 270 top
J43  [1X08_LOCK_NO_SILK]  68.07,70.61 90 top
J44  [1X08_LOCK_NO_SILK]  55.37,88.39 270 top
J45  [1X08_LOCK_NO_SILK]  83.82,70.61 90 top
J46  [1X08_LOCK_NO_SILK]  71.12,88.39 270 top
J47  [1X08_LOCK_NO_SILK]  99.57,70.61 90 top
J48  [1X08_LOCK_NO_SILK]  86.87,88.39 270 top
J49  [1X08_LOCK_NO_SILK]  20.83,91.44 90 top
J50  [1X08_LOCK_NO_SILK]  8.13,109.22 270 top
J51  [1X08_LOCK_NO_SILK]  36.58,91.44 90 top
J52  [1X08_LOCK_NO_SILK]  23.88,109.22 270 top
J53  [1X08_LOCK_NO_SILK]  52.32,91.44 90 top
J54  [1X08_LOCK_NO_SILK]  39.62,109.22 270 top
J55  [1X08_LOCK_NO_SILK]  68.07,91.44 90 top
J56  [1X08_LOCK_NO_SILK]  55.37,109.22 270 top
J57  [1X08_LOCK_NO_SILK]  83.82,91.44 90 top
J58  [1X08_LOCK_NO_SILK]  71.12,109.22 270 top
J59  [1X08_LOCK_NO_SILK]  99.57,91.44 90 top
J60  [1X08_LOCK_NO_SILK]  86.87,109.22 270 top
LOGO1  SFE_LOGO_NAME.08_INCH  [SFE_LOGO_NAME_.08]  30.23,13.59 0 top
LOGO2  SFE_LOGO_FLAME.1_INCH  [SFE_LOGO_FLAME_.1]  27.43,21.59 0 top
LOGO3  SFE_LOGO_NAME.08_INCH  [SFE_LOGO_NAME_.08]  14.48,13.59 0 top
LOGO4  SFE_LOGO_FLAME.1_INCH  [SFE_LOGO_FLAME_.1]  11.68,21.59 0 top
LOGO5  OSHW-LOGOS  [OSHW-LOGO-S]  14.48,20.32 0 bottom
LOGO6  OSHW-LOGOS  [OSHW-LOGO-S]  30.23,20.32 0 bottom
LOGO7  SFE_LOGO_NAME.08_INCH  [SFE_LOGO_NAME_.08]  45.97,13.59 0 top
LOGO8  SFE_LOGO_FLAME.1_INCH  [SFE_LOGO_FLAME_.1]  43.18,21.59 0 top
LOGO9  OSHW-LOGOS  [OSHW-LOGO-S]  45.97,20.32 0 bottom
LOGO10  SFE_LOGO_NAME.08_INCH  [SFE_LOGO_NAME_.08]  61.72,13.59 0 top
LOGO11  SFE_LOGO_FLAME.1_INCH  [SFE_LOGO_FLAME_.1]  58.93,21.59 0 top
LOGO12  OSHW-LOGOS  [OSHW-LOGO-S]  61.72,20.32 0 bottom
LOGO13  SFE_LOGO_NAME.08_INCH  [SFE_LOGO_NAME_.08]  77.47,13.59 0 top
LOGO14  SFE_LOGO_FLAME.1_INCH  [SFE_LOGO_FLAME_.1]  74.68,21.59 0 top
LOGO15  OSHW-LOGOS  [OSHW-LOGO-S]  77.47,20.32 0 bottom
LOGO16  SFE_LOGO_NAME.08_INCH  [SFE_LOGO_NAME_.08]  93.22,13.59 0 top
LOGO17  SFE_LOGO_FLAME.1_INCH  [SFE_LOGO_FLAME_.1]  90.42,21.59 0 top
LOGO18  OSHW-LOGOS  [OSHW-LOGO-S]  93.22,20.32 0 bottom
LOGO19  SFE_LOGO_NAME.08_INCH  [SFE_LOGO_NAME_.08]  14.48,34.42 0 top
LOGO20  SFE_LOGO_FLAME.1_INCH  [SFE_LOGO_FLAME_.1]  11.68,42.42 0 top
LOGO21  OSHW-LOGOS  [OSHW-LOGO-S]  14.48,41.15 0 bottom
LOGO22  SFE_LOGO_NAME.08_INCH  [SFE_LOGO_NAME_.08]  30.23,34.42 0 top
LOGO23  SFE_LOGO_FLAME.1_INCH  [SFE_LOGO_FLAME_.1]  27.43,42.42 0 top
LOGO24  OSHW-LOGOS  [OSHW-LOGO-S]  30.23,41.15 0 bottom
LOGO25  SFE_LOGO_NAME.08_INCH  [SFE_LOGO_NAME_.08]  45.97,34.42 0 top
LOGO26  SFE_LOGO_FLAME.1_INCH  [SFE_LOGO_FLAME_.1]  43.18,42.42 0 top
LOGO27  OSHW-LOGOS  [OSHW-LOGO-S]  45.97,41.15 0 bottom
LOGO28  SFE_LOGO_NAME.08_INCH  [SFE_LOGO_NAME_.08]  61.72,34.42 0 top
LOGO29  SFE_LOGO_FLAME.1_INCH  [SFE_LOGO_FLAME_.1]  58.93,42.42 0 top
LOGO30  OSHW-LOGOS  [OSHW-LOGO-S]  61.72,41.15 0 bottom
LOGO31  SFE_LOGO_NAME.08_INCH  [SFE_LOGO_NAME_.08]  77.47,34.42 0 top
LOGO32  SFE_LOGO_FLAME.1_INCH  [SFE_LOGO_FLAME_.1]  74.68,42.42 0 top
LOGO33  OSHW-LOGOS  [OSHW-LOGO-S]  77.47,41.15 0 bottom
LOGO34  SFE_LOGO_NAME.08_INCH  [SFE_LOGO_NAME_.08]  93.22,34.42 0 top
LOGO35  SFE_LOGO_FLAME.1_INCH  [SFE_LOGO_FLAME_.1]  90.42,42.42 0 top
LOGO36  OSHW-LOGOS  [OSHW-LOGO-S]  93.22,41.15 0 bottom
LOGO37  SFE_LOGO_NAME.08_INCH  [SFE_LOGO_NAME_.08]  14.48,55.24 0 top
LOGO38  SFE_LOGO_FLAME.1_INCH  [SFE_LOGO_FLAME_.1]  11.68,63.25 0 top
LOGO39  OSHW-LOGOS  [OSHW-LOGO-S]  14.48,61.98 0 bottom
LOGO40  SFE_LOGO_NAME.08_INCH  [SFE_LOGO_NAME_.08]  30.23,55.24 0 top
LOGO41  SFE_LOGO_FLAME.1_INCH  [SFE_LOGO_FLAME_.1]  27.43,63.25 0 top
LOGO42  OSHW-LOGOS  [OSHW-LOGO-S]  30.23,61.98 0 bottom
LOGO43  SFE_LOGO_NAME.08_INCH  [SFE_LOGO_NAME_.08]  45.97,55.24 0 top
LOGO44  SFE_LOGO_FLAME.1_INCH  [SFE_LOGO_FLAME_.1]  43.18,63.25 0 top
LOGO45  OSHW-LOGOS  [OSHW-LOGO-S]  45.97,61.98 0 bottom
LOGO46  SFE_LOGO_NAME.08_INCH  [SFE_LOGO_NAME_.08]  61.72,55.24 0 top
LOGO47  SFE_LOGO_FLAME.1_INCH  [SFE_LOGO_FLAME_.1]  58.93,63.25 0 top
LOGO48  OSHW-LOGOS  [OSHW-LOGO-S]  61.72,61.98 0 bottom
LOGO49  SFE_LOGO_NAME.08_INCH  [SFE_LOGO_NAME_.08]  77.47,55.24 0 top
LOGO50  SFE_LOGO_FLAME.1_INCH  [SFE_LOGO_FLAME_.1]  74.68,63.25 0 top
LOGO51  OSHW-LOGOS  [OSHW-LOGO-S]  77.47,61.98 0 bottom
LOGO52  SFE_LOGO_NAME.08_INCH  [SFE_LOGO_NAME_.08]  93.22,55.24 0 top
LOGO53  SFE_LOGO_FLAME.1_INCH  [SFE_LOGO_FLAME_.1]  90.42,63.25 0 top
LOGO54  OSHW-LOGOS  [OSHW-LOGO-S]  93.22,61.98 0 bottom
LOGO55  SFE_LOGO_NAME.08_INCH  [SFE_LOGO_NAME_.08]  14.48,76.07 0 top
LOGO56  SFE_LOGO_FLAME.1_INCH  [SFE_LOGO_FLAME_.1]  11.68,84.07 0 top
LOGO57  OSHW-LOGOS  [OSHW-LOGO-S]  14.48,82.8 0 bottom
LOGO58  SFE_LOGO_NAME.08_INCH  [SFE_LOGO_NAME_.08]  30.23,76.07 0 top
LOGO59  SFE_LOGO_FLAME.1_INCH  [SFE_LOGO_FLAME_.1]  27.43,84.07 0 top
LOGO60  OSHW-LOGOS  [OSHW-LOGO-S]  30.23,82.8 0 bottom
LOGO61  SFE_LOGO_NAME.08_INCH  [SFE_LOGO_NAME_.08]  45.97,76.07 0 top
LOGO62  SFE_LOGO_FLAME.1_INCH  [SFE_LOGO_FLAME_.1]  43.18,84.07 0 top
LOGO63  OSHW-LOGOS  [OSHW-LOGO-S]  45.97,82.8 0 bottom
LOGO64  SFE_LOGO_NAME.08_INCH  [SFE_LOGO_NAME_.08]  61.72,76.07 0 top
LOGO65  SFE_LOGO_FLAME.1_INCH  [SFE_LOGO_FLAME_.1]  58.93,84.07 0 top
LOGO66  OSHW-LOGOS  [OSHW-LOGO-S]  61.72,82.8 0 bottom
LOGO67  SFE_LOGO_NAME.08_INCH  [SFE_LOGO_NAME_.08]  77.47,76.07 0 top
LOGO68  SFE_LOGO_FLAME.1_INCH  [SFE_LOGO_FLAME_.1]  74.68,84.07 0 top
LOGO69  OSHW-LOGOS  [OSHW-LOGO-S]  77.47,82.8 0 bottom
LOGO70  SFE_LOGO_NAME.08_INCH  [SFE_LOGO_NAME_.08]  93.22,76.07 0 top
LOGO71  SFE_LOGO_FLAME.1_INCH  [SFE_LOGO_FLAME_.1]  90.42,84.07 0 top
LOGO72  OSHW-LOGOS  [OSHW-LOGO-S]  93.22,82.8 0 bottom
LOGO73  SFE_LOGO_NAME.08_INCH  [SFE_LOGO_NAME_.08]  14.48,96.9 0 top
LOGO74  SFE_LOGO_FLAME.1_INCH  [SFE_LOGO_FLAME_.1]  11.68,104.9 0 top
LOGO75  OSHW-LOGOS  [OSHW-LOGO-S]  14.48,103.63 0 bottom
LOGO76  SFE_LOGO_NAME.08_INCH  [SFE_LOGO_NAME_.08]  30.23,96.9 0 top
LOGO77  SFE_LOGO_FLAME.1_INCH  [SFE_LOGO_FLAME_.1]  27.43,104.9 0 top
LOGO78  OSHW-LOGOS  [OSHW-LOGO-S]  30.23,103.63 0 bottom
LOGO79  SFE_LOGO_NAME.08_INCH  [SFE_LOGO_NAME_.08]  45.97,96.9 0 top
LOGO80  SFE_LOGO_FLAME.1_INCH  [SFE_LOGO_FLAME_.1]  43.18,104.9 0 top
LOGO81  OSHW-LOGOS  [OSHW-LOGO-S]  45.97,103.63 0 bottom
LOGO82  SFE_LOGO_NAME.08_INCH  [SFE_LOGO_NAME_.08]  61.72,96.9 0 top
LOGO83  SFE_LOGO_FLAME.1_INCH  [SFE_LOGO_FLAME_.1]  58.93,104.9 0 top
LOGO84  OSHW-LOGOS  [OSHW-LOGO-S]  61.72,103.63 0 bottom
LOGO85  SFE_LOGO_NAME.08_INCH  [SFE_LOGO_NAME_.08]  77.47,96.9 0 top
LOGO86  SFE_LOGO_FLAME.1_INCH  [SFE_LOGO_FLAME_.1]  74.68,104.9 0 top
LOGO87  OSHW-LOGOS  [OSHW-LOGO-S]  77.47,103.63 0 bottom
LOGO88  SFE_LOGO_NAME.08_INCH  [SFE_LOGO_NAME_.08]  93.22,96.9 0 top
LOGO89  SFE_LOGO_FLAME.1_INCH  [SFE_LOGO_FLAME_.1]  90.42,104.9 0 top
LOGO90  OSHW-LOGOS  [OSHW-LOGO-S]  93.22,103.63 0 bottom
R1  2.2k  [0603]  10.92,25.27 270 top
R2  1k  [0603]  33.27,8.13 180 top
R3  1k  [0603]  17.53,8.13 180 top
R4  100k  [0603]  33.91,17.02 270 top
R5  100k  [0603]  18.16,17.02 270 top
R6  100k  [0603]  16.38,11.3 90 top
R7  100k  [0603]  18.29,20.19 180 top
R8  100k  [0603]  14.48,11.3 90 top
R9  100k  [0603]  18.29,11.3 90 top
R10  100k  [0603]  12.57,11.3 90 top
R11  100k  [0603]  32.13,11.3 90 top
R12  100k  [0603]  34.04,20.19 180 top
R13  100k  [0603]  30.23,11.3 90 top
R14  330  [0603]  18.29,25.27 270 top
R15  0.12  [1206]  10.67,9.4 90 top
R16  100k  [0603]  34.04,11.3 90 top
R17  100k  [0603]  28.32,11.3 90 top
R18  330  [0603]  34.04,25.27 270 top
R19  0.12  [1206]  26.42,9.4 90 top
R20  2.2k  [0603]  26.67,25.27 270 top
R21  1k  [0603]  49.02,8.13 180 top
R22  100k  [0603]  49.66,17.02 270 top
R23  100k  [0603]  47.88,11.3 90 top
R24  100k  [0603]  49.78,20.19 180 top
R25  100k  [0603]  45.97,11.3 90 top
R26  100k  [0603]  49.78,11.3 90 top
R27  100k  [0603]  44.07,11.3 90 top
R28  330  [0603]  49.78,25.27 270 top
R29  0.12  [1206]  42.16,9.4 90 top
R30  2.2k  [0603]  42.42,25.27 270 top
R31  1k  [0603]  64.77,8.13 180 top
R32  100k  [0603]  65.41,17.02 270 top
R33  100k  [0603]  63.63,11.3 90 top
R34  100k  [0603]  65.53,20.19 180 top
R35  100k  [0603]  61.72,11.3 90 top
R36  100k  [0603]  65.53,11.3 90 top
R37  100k  [0603]  59.82,11.3 90 top
R38  330  [0603]  65.53,25.27 270 top
R39  0.12  [1206]  57.91,9.4 90 top
R40  2.2k  [0603]  58.17,25.27 270 top
R41  1k  [0603]  80.52,8.13 180 top
R42  100k  [0603]  81.15,17.02 270 top
R43  100k  [0603]  79.38,11.3 90 top
R44  100k  [0603]  81.28,20.19 180 top
R45  100k  [0603]  77.47,11.3 90 top
R46  100k  [0603]  81.28,11.3 90 top
R47  100k  [0603]  75.56,11.3 90 top
R48  330  [0603]  81.28,25.27 270 top
R49  0.12  [1206]  73.66,9.4 90 top
R50  2.2k  [0603]  73.91,25.27 270 top
R51  1k  [0603]  96.27,8.13 180 top
R52  100k  [0603]  96.9,17.02 270 top
R53  100k  [0603]  95.12,11.3 90 top
R54  100k  [0603]  97.03,20.19 180 top
R55  100k  [0603]  93.22,11.3 90 top
R56  100k  [0603]  97.03,11.3 90 top
R57  100k  [0603]  91.31,11.3 90 top
R58  330  [0603]  97.03,25.27 270 top
R59  0.12  [1206]  89.41,9.4 90 top
R60  2.2k  [0603]  89.66,25.27 270 top
R61  1k  [0603]  17.53,28.96 180 top
R62  100k  [0603]  18.16,37.85 270 top
R63  100k  [0603]  16.38,32.13 90 top
R64  100k  [0603]  18.29,41.02 180 top
R65  100k  [0603]  14.48,32.13 90 top
R66  100k  [0603]  18.29,32.13 90 top
R67  100k  [0603]  12.57,32.13 90 top
R68  330  [0603]  18.29,46.1 270 top
R69  0.12  [1206]  10.67,30.23 90 top
R70  2.2k  [0603]  10.92,46.1 270 top
R71  1k  [0603]  33.27,28.96 180 top
R72  100k  [0603]  33.91,37.85 270 top
R73  100k  [0603]  32.13,32.13 90 top
R74  100k  [0603]  34.04,41.02 180 top
R75  100k  [0603]  30.23,32.13 90 top
R76  100k  [0603]  34.04,32.13 90 top
R77  100k  [0603]  28.32,32.13 90 top
R78  330  [0603]  34.04,46.1 270 top
R79  0.12  [1206]  26.42,30.23 90 top
R80  2.2k  [0603]  26.67,46.1 270 top
R81  1k  [0603]  49.02,28.96 180 top
R82  100k  [0603]  49.66,37.85 270 top
R83  100k  [0603]  47.88,32.13 90 top
R84  100k  [0603]  49.78,41.02 180 top
R85  100k  [0603]  45.97,32.13 90 top
R86  100k  [0603]  49.78,32.13 90 top
R87  100k  [0603]  44.07,32.13 90 top
R88  330  [0603]  49.78,46.1 270 top
R89  0.12  [1206]  42.16,30.23 90 top
R90  2.2k  [0603]  42.42,46.1 270 top
R91  1k  [0603]  64.77,28.96 180 top
R92  100k  [0603]  65.41,37.85 270 top
R93  100k  [0603]  63.63,32.13 90 top
R94  100k  [0603]  65.53,41.02 180 top
R95  100k  [0603]  61.72,32.13 90 top
R96  100k  [0603]  65.53,32.13 90 top
R97  100k  [0603]  59.82,32.13 90 top
R98  330  [0603]  65.53,46.1 270 top
R99  0.12  [1206]  57.91,30.23 90 top
R100  2.2k  [0603]  58.17,46.1 270 top
R101  1k  [0603]  80.52,28.96 180 top
R102  100k  [0603]  81.15,37.85 270 top
R103  100k  [0603]  79.38,32.13 90 top
R104  100k  [0603]  81.28,41.02 180 top
R105  100k  [0603]  77.47,32.13 90 top
R106  100k  [0603]  81.28,32.13 90 top
R107  100k  [0603]  75.56,32.13 90 top
R108  330  [0603]  81.28,46.1 270 top
R109  0.12  [1206]  73.66,30.23 90 top
R110  2.2k  [0603]  73.91,46.1 270 top
R111  1k  [0603]  96.27,28.96 180 top
R112  100k  [0603]  96.9,37.85 270 top
R113  100k  [0603]  95.12,32.13 90 top
R114  100k  [0603]  97.03,41.02 180 top
R115  100k  [0603]  93.22,32.13 90 top
R116  100k  [0603]  97.03,32.13 90 top
R117  100k  [0603]  91.31,32.13 90 top
R118  330  [0603]  97.03,46.1 270 top
R119  0.12  [1206]  89.41,30.23 90 top
R120  2.2k  [0603]  89.66,46.1 270 top
R121  1k  [0603]  17.53,49.78 180 top
R122  100k  [0603]  18.16,58.67 270 top
R123  100k  [0603]  16.38,52.96 90 top
R124  100k  [0603]  18.29,61.85 180 top
R125  100k  [0603]  14.48,52.96 90 top
R126  100k  [0603]  18.29,52.96 90 top
R127  100k  [0603]  12.57,52.96 90 top
R128  330  [0603]  18.29,66.93 270 top
R129  0.12  [1206]  10.67,51.05 90 top
R130  2.2k  [0603]  10.92,66.93 270 top
R131  1k  [0603]  33.27,49.78 180 top
R132  100k  [0603]  33.91,58.67 270 top
R133  100k  [0603]  32.13,52.96 90 top
R134  100k  [0603]  34.04,61.85 180 top
R135  100k  [0603]  30.23,52.96 90 top
R136  100k  [0603]  34.04,52.96 90 top
R137  100k  [0603]  28.32,52.96 90 top
R138  330  [0603]  34.04,66.93 270 top
R139  0.12  [1206]  26.42,51.05 90 top
R140  2.2k  [0603]  26.67,66.93 270 top
R141  1k  [0603]  49.02,49.78 180 top
R142  100k  [0603]  49.66,58.67 270 top
R143  100k  [0603]  47.88,52.96 90 top
R144  100k  [0603]  49.78,61.85 180 top
R145  100k  [0603]  45.97,52.96 90 top
R146  100k  [0603]  49.78,52.96 90 top
R147  100k  [0603]  44.07,52.96 90 top
R148  330  [0603]  49.78,66.93 270 top
R149  0.12  [1206]  42.16,51.05 90 top
R150  2.2k  [0603]  42.42,66.93 270 top
R151  1k  [0603]  64.77,49.78 180 top
R152  100k  [0603]  65.41,58.67 270 top
R153  100k  [0603]  63.63,52.96 90 top
R154  100k  [0603]  65.53,61.85 180 top
R155  100k  [0603]  61.72,52.96 90 top
R156  100k  [0603]  65.53,52.96 90 top
R157  100k  [0603]  59.82,52.96 90 top
R158  330  [0603]  65.53,66.93 270 top
R159  0.12  [1206]  57.91,51.05 90 top
R160  2.2k  [0603]  58.17,66.93 270 top
R161  1k  [0603]  80.52,49.78 180 top
R162  100k  [0603]  81.15,58.67 270 top
R163  100k  [0603]  79.38,52.96 90 top
R164  100k  [0603]  81.28,61.85 180 top
R165  100k  [0603]  77.47,52.96 90 top
R166  100k  [0603]  81.28,52.96 90 top
R167  100k  [0603]  75.56,52.96 90 top
R168  330  [0603]  81.28,66.93 270 top
R169  0.12  [1206]  73.66,51.05 90 top
R170  2.2k  [0603]  73.91,66.93 270 top
R171  1k  [0603]  96.27,49.78 180 top
R172  100k  [0603]  96.9,58.67 270 top
R173  100k  [0603]  95.12,52.96 90 top
R174  100k  [0603]  97.03,61.85 180 top
R175  100k  [0603]  93.22,52.96 90 top
R176  100k  [0603]  97.03,52.96 90 top
R177  100k  [0603]  91.31,52.96 90 top
R178  330  [0603]  97.03,66.93 270 top
R179  0.12  [1206]  89.41,51.05 90 top
R180  2.2k  [0603]  89.66,66.93 270 top
R181  1k  [0603]  17.53,70.61 180 top
R182  100k  [0603]  18.16,79.5 270 top
R183  100k  [0603]  16.38,73.79 90 top
R184  100k  [0603]  18.29,82.68 180 top
R185  100k  [0603]  14.48,73.79 90 top
R186  100k  [0603]  18.29,73.79 90 top
R187  100k  [0603]  12.57,73.79 90 top
R188  330  [0603]  18.29,87.76 270 top
R189  0.12  [1206]  10.67,71.88 90 top
R190  2.2k  [0603]  10.92,87.76 270 top
R191  1k  [0603]  33.27,70.61 180 top
R192  100k  [0603]  33.91,79.5 270 top
R193  100k  [0603]  32.13,73.79 90 top
R194  100k  [0603]  34.04,82.68 180 top
R195  100k  [0603]  30.23,73.79 90 top
R196  100k  [0603]  34.04,73.79 90 top
R197  100k  [0603]  28.32,73.79 90 top
R198  330  [0603]  34.04,87.76 270 top
R199  0.12  [1206]  26.42,71.88 90 top
R200  2.2k  [0603]  26.67,87.76 270 top
R201  1k  [0603]  49.02,70.61 180 top
R202  100k  [0603]  49.66,79.5 270 top
R203  100k  [0603]  47.88,73.79 90 top
R204  100k  [0603]  49.78,82.68 180 top
R205  100k  [0603]  45.97,73.79 90 top
R206  100k  [0603]  49.78,73.79 90 top
R207  100k  [0603]  44.07,73.79 90 top
R208  330  [0603]  49.78,87.76 270 top
R209  0.12  [1206]  42.16,71.88 90 top
R210  2.2k  [0603]  42.42,87.76 270 top
R211  1k  [0603]  64.77,70.61 180 top
R212  100k  [0603]  65.41,79.5 270 top
R213  100k  [0603]  63.63,73.79 90 top
R214  100k  [0603]  65.53,82.68 180 top
R215  100k  [0603]  61.72,73.79 90 top
R216  100k  [0603]  65.53,73.79 90 top
R217  100k  [0603]  59.82,73.79 90 top
R218  330  [0603]  65.53,87.76 270 top
R219  0.12  [1206]  57.91,71.88 90 top
R220  2.2k  [0603]  58.17,87.76 270 top
R221  1k  [0603]  80.52,70.61 180 top
R222  100k  [0603]  81.15,79.5 270 top
R223  100k  [0603]  79.38,73.79 90 top
R224  100k  [0603]  81.28,82.68 180 top
R225  100k  [0603]  77.47,73.79 90 top
R226  100k  [0603]  81.28,73.79 90 top
R227  100k  [0603]  75.56,73.79 90 top
R228  330  [0603]  81.28,87.76 270 top
R229  0.12  [1206]  73.66,71.88 90 top
R230  2.2k  [0603]  73.91,87.76 270 top
R231  1k  [0603]  96.27,70.61 180 top
R232  100k  [0603]  96.9,79.5 270 top
R233  100k  [0603]  95.12,73.79 90 top
R234  100k  [0603]  97.03,82.68 180 top
R235  100k  [0603]  93.22,73.79 90 top
R236  100k  [0603]  97.03,73.79 90 top
R237  100k  [0603]  91.31,73.79 90 top
R238  330  [0603]  97.03,87.76 270 top
R239  0.12  [1206]  89.41,71.88 90 top
R240  2.2k  [0603]  89.66,87.76 270 top
R241  1k  [0603]  17.53,91.44 180 top
R242  100k  [0603]  18.16,100.33 270 top
R243  100k  [0603]  16.38,94.62 90 top
R244  100k  [0603]  18.29,103.51 180 top
R245  100k  [0603]  14.48,94.62 90 top
R246  100k  [0603]  18.29,94.62 90 top
R247  100k  [0603]  12.57,94.62 90 top
R248  330  [0603]  18.29,108.59 270 top
R249  0.12  [1206]  10.67,92.71 90 top
R250  2.2k  [0603]  10.92,108.59 270 top
R251  1k  [0603]  33.27,91.44 180 top
R252  100k  [0603]  33.91,100.33 270 top
R253  100k  [0603]  32.13,94.62 90 top
R254  100k  [0603]  34.04,103.51 180 top
R255  100k  [0603]  30.23,94.62 90 top
R256  100k  [0603]  34.04,94.62 90 top
R257  100k  [0603]  28.32,94.62 90 top
R258  330  [0603]  34.04,108.59 270 top
R259  0.12  [1206]  26.42,92.71 90 top
R260  2.2k  [0603]  26.67,108.59 270 top
R261  1k  [0603]  49.02,91.44 180 top
R262  100k  [0603]  49.66,100.33 270 top
R263  100k  [0603]  47.88,94.62 90 top
R264  100k  [0603]  49.78,103.51 180 top
R265  100k  [0603]  45.97,94.62 90 top
R266  100k  [0603]  49.78,94.62 90 top
R267  100k  [0603]  44.07,94.62 90 top
R268  330  [0603]  49.78,108.59 270 top
R269  0.12  [1206]  42.16,92.71 90 top
R270  2.2k  [0603]  42.42,108.59 270 top
R271  1k  [0603]  64.77,91.44 180 top
R272  100k  [0603]  65.41,100.33 270 top
R273  100k  [0603]  63.63,94.62 90 top
R274  100k  [0603]  65.53,103.51 180 top
R275  100k  [0603]  61.72,94.62 90 top
R276  100k  [0603]  65.53,94.62 90 top
R277  100k  [0603]  59.82,94.62 90 top
R278  330  [0603]  65.53,108.59 270 top
R279  0.12  [1206]  57.91,92.71 90 top
R280  2.2k  [0603]  58.17,108.59 270 top
R281  1k  [0603]  80.52,91.44 180 top
R282  100k  [0603]  81.15,100.33 270 top
R283  100k  [0603]  79.38,94.62 90 top
R284  100k  [0603]  81.28,103.51 180 top
R285  100k  [0603]  77.47,94.62 90 top
R286  100k  [0603]  81.28,94.62 90 top
R287  100k  [0603]  75.56,94.62 90 top
R288  330  [0603]  81.28,108.59 270 top
R289  0.12  [1206]  73.66,92.71 90 top
R290  2.2k  [0603]  73.91,108.59 270 top
R291  1k  [0603]  96.27,91.44 180 top
R292  100k  [0603]  96.9,100.33 270 top
R293  100k  [0603]  95.12,94.62 90 top
R294  100k  [0603]  97.03,103.51 180 top
R295  100k  [0603]  93.22,94.62 90 top
R296  100k  [0603]  97.03,94.62 90 top
R297  100k  [0603]  91.31,94.62 90 top
R298  330  [0603]  97.03,108.59 270 top
R299  0.12  [1206]  89.41,92.71 90 top
R300  2.2k  [0603]  89.66,108.59 270 top
S  JUMPER-SMT_2_NC_TRACE_SILK  [SMT-JUMPER_2_NC_TRACE_SILK]  16.38,25.65 270 top
S1  JUMPER-SMT_2_NC_TRACE_SILK  [SMT-JUMPER_2_NC_TRACE_SILK]  32.13,25.65 270 top
S2  JUMPER-SMT_2_NC_TRACE_SILK  [SMT-JUMPER_2_NC_TRACE_SILK]  47.88,25.65 270 top
S3  JUMPER-SMT_2_NC_TRACE_SILK  [SMT-JUMPER_2_NC_TRACE_SILK]  63.63,25.65 270 top
S4  JUMPER-SMT_2_NC_TRACE_SILK  [SMT-JUMPER_2_NC_TRACE_SILK]  79.38,25.65 270 top
S5  JUMPER-SMT_2_NC_TRACE_SILK  [SMT-JUMPER_2_NC_TRACE_SILK]  95.12,25.65 270 top
S6  JUMPER-SMT_2_NC_TRACE_SILK  [SMT-JUMPER_2_NC_TRACE_SILK]  16.38,46.48 270 top
S7  JUMPER-SMT_2_NC_TRACE_SILK  [SMT-JUMPER_2_NC_TRACE_SILK]  32.13,46.48 270 top
S8  JUMPER-SMT_2_NC_TRACE_SILK  [SMT-JUMPER_2_NC_TRACE_SILK]  47.88,46.48 270 top
S9  JUMPER-SMT_2_NC_TRACE_SILK  [SMT-JUMPER_2_NC_TRACE_SILK]  63.63,46.48 270 top
S10  JUMPER-SMT_2_NC_TRACE_SILK  [SMT-JUMPER_2_NC_TRACE_SILK]  79.38,46.48 270 top
S11  JUMPER-SMT_2_NC_TRACE_SILK  [SMT-JUMPER_2_NC_TRACE_SILK]  95.12,46.48 270 top
S12  JUMPER-SMT_2_NC_TRACE_SILK  [SMT-JUMPER_2_NC_TRACE_SILK]  16.38,67.31 270 top
S13  JUMPER-SMT_2_NC_TRACE_SILK  [SMT-JUMPER_2_NC_TRACE_SILK]  32.13,67.31 270 top
S14  JUMPER-SMT_2_NC_TRACE_SILK  [SMT-JUMPER_2_NC_TRACE_SILK]  47.88,67.31 270 top
S15  JUMPER-SMT_2_NC_TRACE_SILK  [SMT-JUMPER_2_NC_TRACE_SILK]  63.63,67.31 270 top
S16  JUMPER-SMT_2_NC_TRACE_SILK  [SMT-JUMPER_2_NC_TRACE_SILK]  79.38,67.31 270 top
S17  JUMPER-SMT_2_NC_TRACE_SILK  [SMT-JUMPER_2_NC_TRACE_SILK]  95.12,67.31 270 top
S18  JUMPER-SMT_2_NC_TRACE_SILK  [SMT-JUMPER_2_NC_TRACE_SILK]  16.38,88.14 270 top
S19  JUMPER-SMT_2_NC_TRACE_SILK  [SMT-JUMPER_2_NC_TRACE_SILK]  32.13,88.14 270 top
S20  JUMPER-SMT_2_NC_TRACE_SILK  [SMT-JUMPER_2_NC_TRACE_SILK]  47.88,88.14 270 top
S21  JUMPER-SMT_2_NC_TRACE_SILK  [SMT-JUMPER_2_NC_TRACE_SILK]  63.63,88.14 270 top
S22  JUMPER-SMT_2_NC_TRACE_SILK  [SMT-JUMPER_2_NC_TRACE_SILK]  79.38,88.14 270 top
S23  JUMPER-SMT_2_NC_TRACE_SILK  [SMT-JUMPER_2_NC_TRACE_SILK]  95.12,88.14 270 top
S24  JUMPER-SMT_2_NC_TRACE_SILK  [SMT-JUMPER_2_NC_TRACE_SILK]  16.38,108.97 270 top
S25  JUMPER-SMT_2_NC_TRACE_SILK  [SMT-JUMPER_2_NC_TRACE_SILK]  32.13,108.97 270 top
S26  JUMPER-SMT_2_NC_TRACE_SILK  [SMT-JUMPER_2_NC_TRACE_SILK]  47.88,108.97 270 top
S27  JUMPER-SMT_2_NC_TRACE_SILK  [SMT-JUMPER_2_NC_TRACE_SILK]  63.63,108.97 270 top
S28  JUMPER-SMT_2_NC_TRACE_SILK  [SMT-JUMPER_2_NC_TRACE_SILK]  79.38,108.97 270 top
S29  JUMPER-SMT_2_NC_TRACE_SILK  [SMT-JUMPER_2_NC_TRACE_SILK]  95.12,108.97 270 top
U1  TMC6300  [QFN-20]  14.48,17.02 90 top
U2  TMC6300  [QFN-20]  30.23,17.02 90 top
U3  TMC6300  [QFN-20]  45.97,17.02 90 top
U4  TMC6300  [QFN-20]  61.72,17.02 90 top
U5  TMC6300  [QFN-20]  77.47,17.02 90 top
U6  TMC6300  [QFN-20]  93.22,17.02 90 top
U7  TMC6300  [QFN-20]  14.48,37.85 90 top
U8  TMC6300  [QFN-20]  30.23,37.85 90 top
U9  TMC6300  [QFN-20]  45.97,37.85 90 top
U10  TMC6300  [QFN-20]  61.72,37.85 90 top
U11  TMC6300  [QFN-20]  77.47,37.85 90 top
U12  TMC6300  [QFN-20]  93.22,37.85 90 top
U13  TMC6300  [QFN-20]  14.48,58.67 90 top
U14  TMC6300  [QFN-20]  30.23,58.67 90 top
U15  TMC6300  [QFN-20]  45.97,58.67 90 top
U16  TMC6300  [QFN-20]  61.72,58.67 90 top
U17  TMC6300  [QFN-20]  77.47,58.67 90 top
U18  TMC6300  [QFN-20]  93.22,58.67 90 top
U19  TMC6300  [QFN-20]  14.48,79.5 90 top
U20  TMC6300  [QFN-20]  30.23,79.5 90 top
U21  TMC6300  [QFN-20]  45.97,79.5 90 top
U22  TMC6300  [QFN-20]  61.72,79.5 90 top
U23  TMC6300  [QFN-20]  77.47,79.5 90 top
U24  TMC6300  [QFN-20]  93.22,79.5 90 top
U25  TMC6300  [QFN-20]  14.48,100.33 90 top
U26  TMC6300  [QFN-20]  30.23,100.33 90 top
U27  TMC6300  [QFN-20]  45.97,100.33 90 top
U28  TMC6300  [QFN-20]  61.72,100.33 90 top
U29  TMC6300  [QFN-20]  77.47,100.33 90 top
U30  TMC6300  [QFN-20]  93.22,100.33 90 top
U$1  [#GND#1]  10.67,23.37 0 bottom
U$2  [#SEN#0]  10.54,13.21 0 bottom
U$3  [#DIAG#0]  11.18,10.67 0 bottom
U$4  [TMC630063003454]  11.3,19.43 0 top
U$5  [#GND#1]  26.42,23.37 0 bottom
U$6  [#VCP#0]  33.78,8.13 0 bottom
U$7  [#VIO#1]  34.29,25.91 0 bottom
U$8  [D0]  28.45,23.75 0 top
U$9  [#U#6]  9.91,20.83 0 bottom
U$10  [V2]  28.32,8.13 0 top
U$11  [S1]  32.26,23.75 0 top
U$12  [#VCP#0]  18.03,8.13 0 bottom
U$13  [#VIO#1]  18.54,25.91 0 bottom
U$14  [D0]  32.13,22.86 0 bottom
U$15  [63001]  14.48,12.32 0 bottom
U$16  [D0]  12.7,23.75 0 top
U$17  [S1]  32.13,24.64 0 bottom
U$18  [D0]  16.38,22.86 0 bottom
U$19  [S1]  16.38,24.64 0 bottom
U$20  [V2]  14.48,9.27 0 bottom
U$21  [#UH#5]  18.8,20.83 0 bottom
U$22  [#UL#4]  18.67,23.37 0 bottom
U$23  [TMC0]  14.48,13.46 0 bottom
U$24  [#VIN#0]  10.67,25.91 0 bottom
U$25  [#V#7]  9.65,18.29 0 bottom
U$26  [V2]  12.57,8.13 0 top
U$27  [S1]  16.51,23.75 0 top
U$28  [#GND#1]  10.67,8.13 0 bottom
U$29  [V2]  30.23,9.27 0 bottom
U$30  [#VH#2]  18.8,15.75 0 bottom
U$31  [#VL#3]  18.54,18.29 0 bottom
U$32  [#W#8]  10.03,15.75 0 bottom
U$33  [#WH#1]  18.54,10.67 0 bottom
U$34  [#WL#0]  18.41,13.21 0 bottom
U$35  [63001]  30.23,12.32 0 bottom
U$36  [TMC0]  30.23,13.46 0 bottom
U$37  [#VIN#0]  26.42,25.91 0 bottom
U$38  [#GND#1]  26.42,8.13 0 bottom
U$39  [#U#6]  25.65,20.83 0 bottom
U$40  [#UH#5]  34.54,20.83 0 bottom
U$41  [#UL#4]  34.42,23.37 0 bottom
U$42  [#V#7]  25.4,18.29 0 bottom
U$43  [#VH#2]  34.54,15.75 0 bottom
U$44  [#VL#3]  34.29,18.29 0 bottom
U$45  [#W#8]  25.78,15.75 0 bottom
U$46  [#WH#1]  34.29,10.67 0 bottom
U$47  [#WL#0]  34.16,13.21 0 bottom
U$48  [#SEN#0]  26.29,13.21 0 bottom
U$49  [#DIAG#0]  26.92,10.67 0 bottom
U$50  [TMC630063003454]  27.05,19.43 0 top
U$51  [#GND#1]  42.16,23.37 0 bottom
U$52  [#VCP#0]  49.53,8.13 0 bottom
U$53  [#VIO#1]  50.04,25.91 0 bottom
U$54  [D0]  44.2,23.75 0 top
U$55  [V2]  44.07,8.13 0 top
U$56  [S1]  48.01,23.75 0 top
U$57  [D0]  47.88,22.86 0 bottom
U$58  [S1]  47.88,24.64 0 bottom
U$59  [V2]  45.97,9.27 0 bottom
U$60  [63001]  45.97,12.32 0 bottom
U$61  [TMC0]  45.97,13.46 0 bottom
U$62  [#VIN#0]  42.16,25.91 0 bottom
U$63  [#GND#1]  42.16,8.13 0 bottom
U$64  [#U#6]  41.4,20.83 0 bottom
U$65  [#UH#5]  50.29,20.83 0 bottom
U$66  [#UL#4]  50.16,23.37 0 bottom
U$67  [#V#7]  41.15,18.29 0 bottom
U$68  [#VH#2]  50.29,15.75 0 bottom
U$69  [#VL#3]  50.04,18.29 0 bottom
U$70  [#W#8]  41.53,15.75 0 bottom
U$71  [#WH#1]  50.04,10.67 0 bottom
U$72  [#WL#0]  49.91,13.21 0 bottom
U$73  [#SEN#0]  42.04,13.21 0 bottom
U$74  [#DIAG#0]  42.67,10.67 0 bottom
U$75  [TMC630063003454]  42.8,19.43 0 top
U$76  [#GND#1]  57.91,23.37 0 bottom
U$77  [#VCP#0]  65.28,8.13 0 bottom
U$78  [#VIO#1]  65.79,25.91 0 bottom
U$79  [D0]  59.94,23.75 0 top
U$80  [V2]  59.82,8.13 0 top
U$81  [S1]  63.75,23.75 0 top
U$82  [D0]  63.63,22.86 0 bottom
U$83  [S1]  63.63,24.64 0 bottom
U$84  [V2]  61.72,9.27 0 bottom
U$85  [63001]  61.72,12.32 0 bottom
U$86  [TMC0]  61.72,13.46 0 bottom
U$87  [#VIN#0]  57.91,25.91 0 bottom
U$88  [#GND#1]  57.91,8.13 0 bottom
U$89  [#U#6]  57.15,20.83 0 bottom
U$90  [#UH#5]  66.04,20.83 0 bottom
U$91  [#UL#4]  65.91,23.37 0 bottom
U$92  [#V#7]  56.9,18.29 0 bottom
U$93  [#VH#2]  66.04,15.75 0 bottom
U$94  [#VL#3]  65.79,18.29 0 bottom
U$95  [#W#8]  57.28,15.75 0 bottom
U$96  [#WH#1]  65.79,10.67 0 bottom
U$97  [#WL#0]  65.66,13.21 0 bottom
U$98  [#SEN#0]  57.78,13.21 0 bottom
U$99  [#DIAG#0]  58.42,10.67 0 bottom
U$100  [TMC630063003454]  58.55,19.43 0 top
U$101  [#GND#1]  73.66,23.37 0 bottom
U$102  [#VCP#0]  81.03,8.13 0 bottom
U$103  [#VIO#1]  81.53,25.91 0 bottom
U$104  [D0]  75.69,23.75 0 top
U$105  [V2]  75.56,8.13 0 top
U$106  [S1]  79.5,23.75 0 top
U$107  [D0]  79.38,22.86 0 bottom
U$108  [S1]  79.38,24.64 0 bottom
U$109  [V2]  77.47,9.27 0 bottom
U$110  [63001]  77.47,12.32 0 bottom
U$111  [TMC0]  77.47,13.46 0 bottom
U$112  [#VIN#0]  73.66,25.91 0 bottom
U$113  [#GND#1]  73.66,8.13 0 bottom
U$114  [#U#6]  72.9,20.83 0 bottom
U$115  [#UH#5]  81.79,20.83 0 bottom
U$116  [#UL#4]  81.66,23.37 0 bottom
U$117  [#V#7]  72.64,18.29 0 bottom
U$118  [#VH#2]  81.79,15.75 0 bottom
U$119  [#VL#3]  81.53,18.29 0 bottom
U$120  [#W#8]  73.03,15.75 0 bottom
U$121  [#WH#1]  81.53,10.67 0 bottom
U$122  [#WL#0]  81.41,13.21 0 bottom
U$123  [#SEN#0]  73.53,13.21 0 bottom
U$124  [#DIAG#0]  74.17,10.67 0 bottom
U$125  [TMC630063003454]  74.3,19.43 0 top
U$126  [#GND#1]  89.41,23.37 0 bottom
U$127  [#VCP#0]  96.77,8.13 0 bottom
U$128  [#VIO#1]  97.28,25.91 0 bottom
U$129  [D0]  91.44,23.75 0 top
U$130  [V2]  91.31,8.13 0 top
U$131  [S1]  95.25,23.75 0 top
U$132  [D0]  95.12,22.86 0 bottom
U$133  [S1]  95.12,24.64 0 bottom
U$134  [V2]  93.22,9.27 0 bottom
U$135  [63001]  93.22,12.32 0 bottom
U$136  [TMC0]  93.22,13.46 0 bottom
U$137  [#VIN#0]  89.41,25.91 0 bottom
U$138  [#GND#1]  89.41,8.13 0 bottom
U$139  [#U#6]  88.65,20.83 0 bottom
U$140  [#UH#5]  97.54,20.83 0 bottom
U$141  [#UL#4]  97.41,23.37 0 bottom
U$142  [#V#7]  88.39,18.29 0 bottom
U$143  [#VH#2]  97.54,15.75 0 bottom
U$144  [#VL#3]  97.28,18.29 0 bottom
U$145  [#W#8]  88.77,15.75 0 bottom
U$146  [#WH#1]  97.28,10.67 0 bottom
U$147  [#WL#0]  97.16,13.21 0 bottom
U$148  [#SEN#0]  89.28,13.21 0 bottom
U$149  [#DIAG#0]  89.92,10.67 0 bottom
U$150  [TMC630063003454]  90.04,19.43 0 top
U$151  [#GND#1]  10.67,44.2 0 bottom
U$152  [#VCP#0]  18.03,28.96 0 bottom
U$153  [#VIO#1]  18.54,46.74 0 bottom
U$154  [D0]  12.7,44.58 0 top
U$155  [V2]  12.57,28.96 0 top
U$156  [S1]  16.51,44.58 0 top
U$157  [D0]  16.38,43.69 0 bottom
U$158  [S1]  16.38,45.47 0 bottom
U$159  [V2]  14.48,30.1 0 bottom